# Altium PCB cuk_control_pcb_grid_connected.PcbDoc (part 1 of 2)
Units mil, origin at the board's own origin, x right, y up, seen from the top; angles counter-clockwise.
Board outline 2965 x 4860 mil, 5 copper layers (Top Layer, MIddle layer1, Signal Layer 1, MIddle Layer 2, Bottom Layer), stack 37.051 mil thick; 205 components, 129 nets, 699 pads, 80 vias.
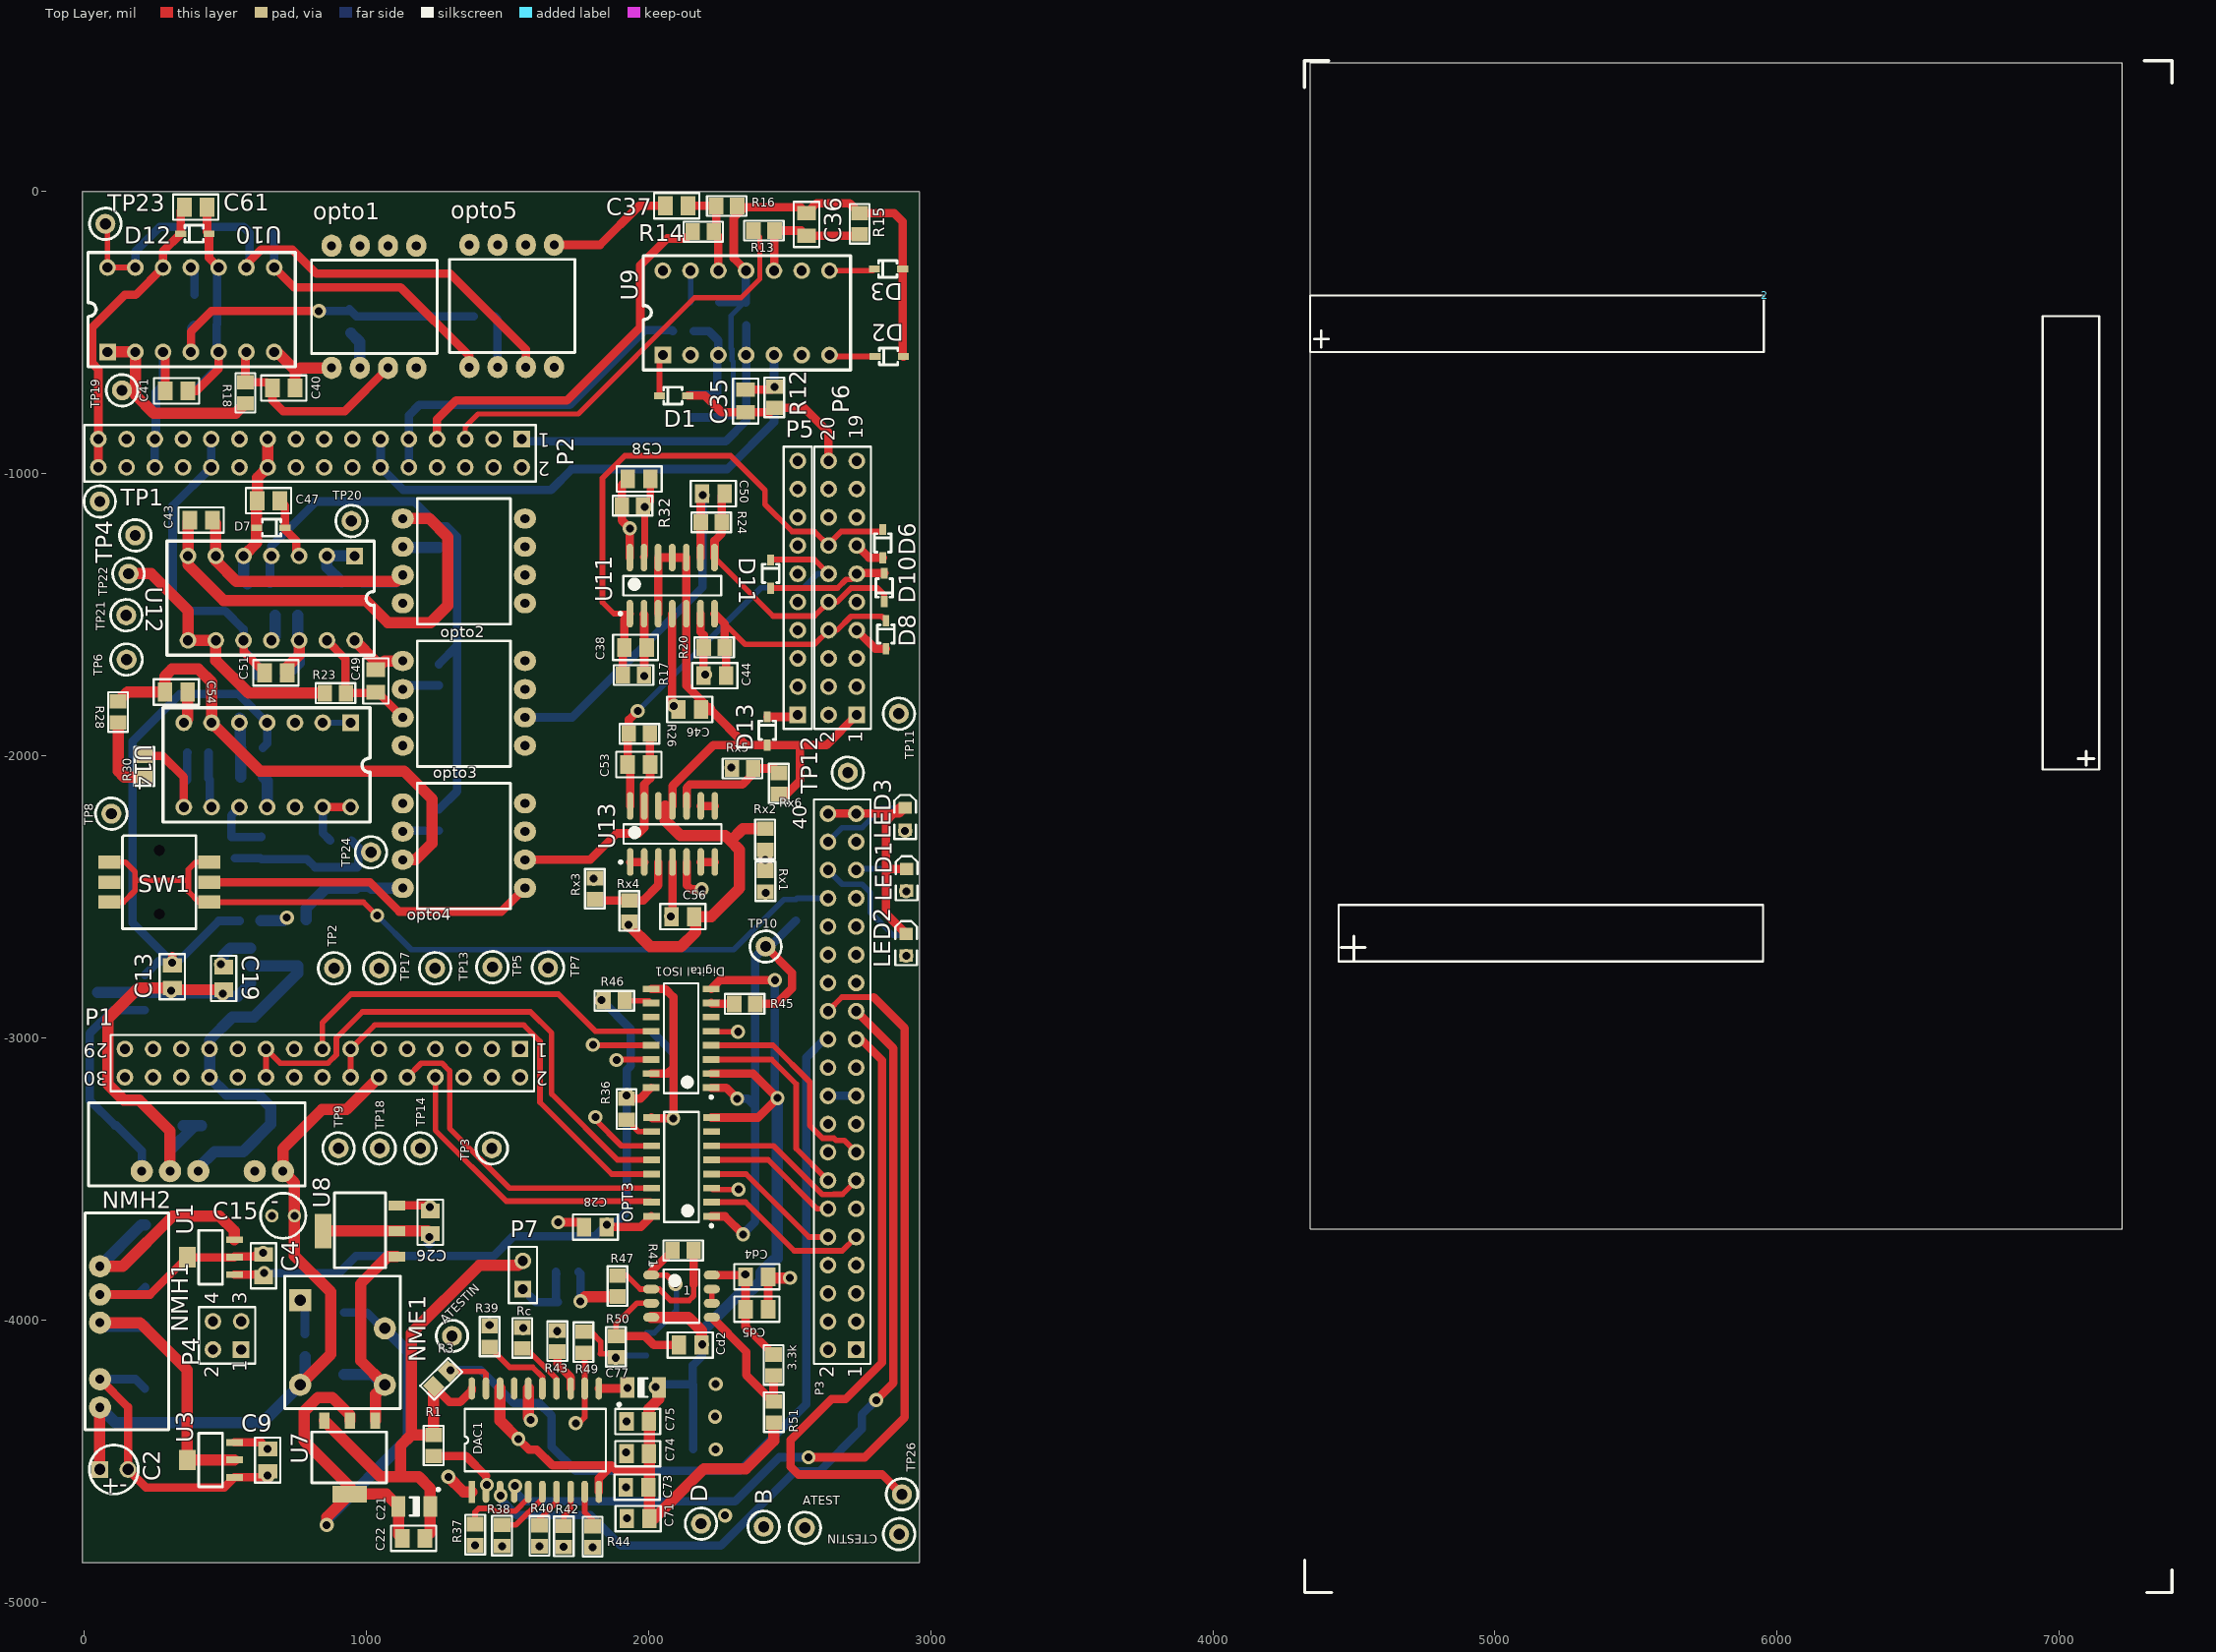
[diagram p0: Top Layer view]
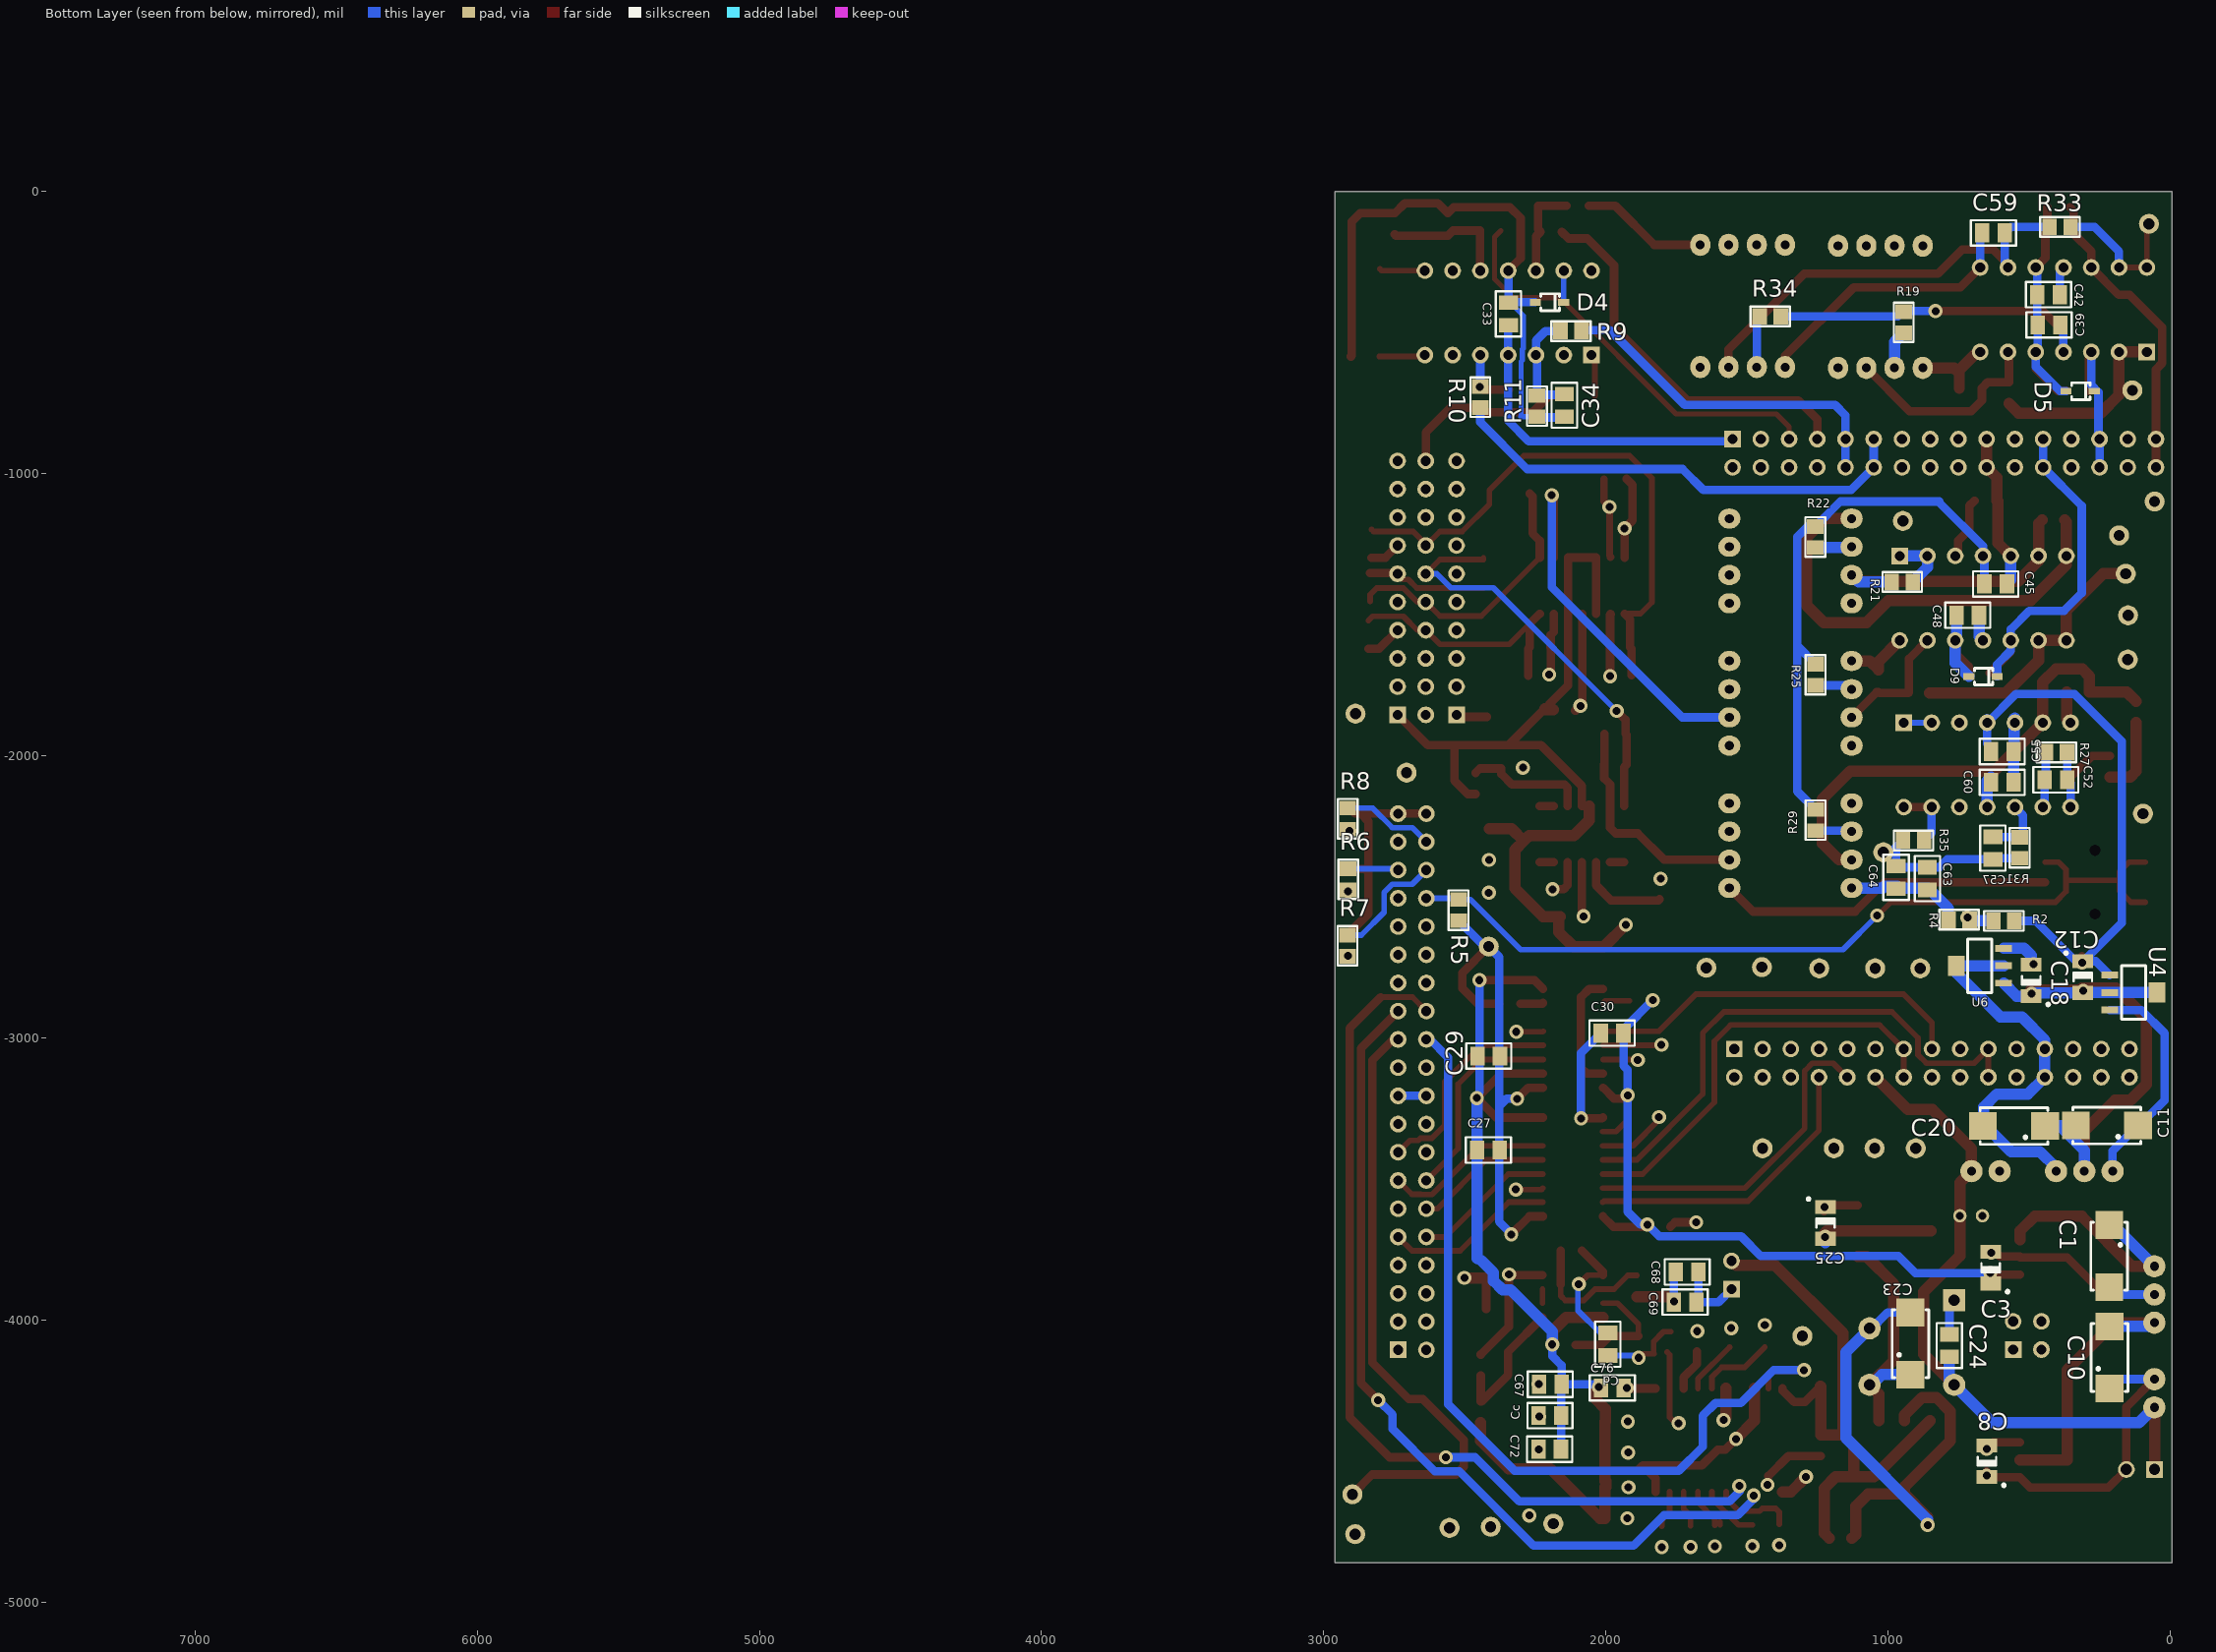
[diagram p1: Bottom Layer view, seen from below]
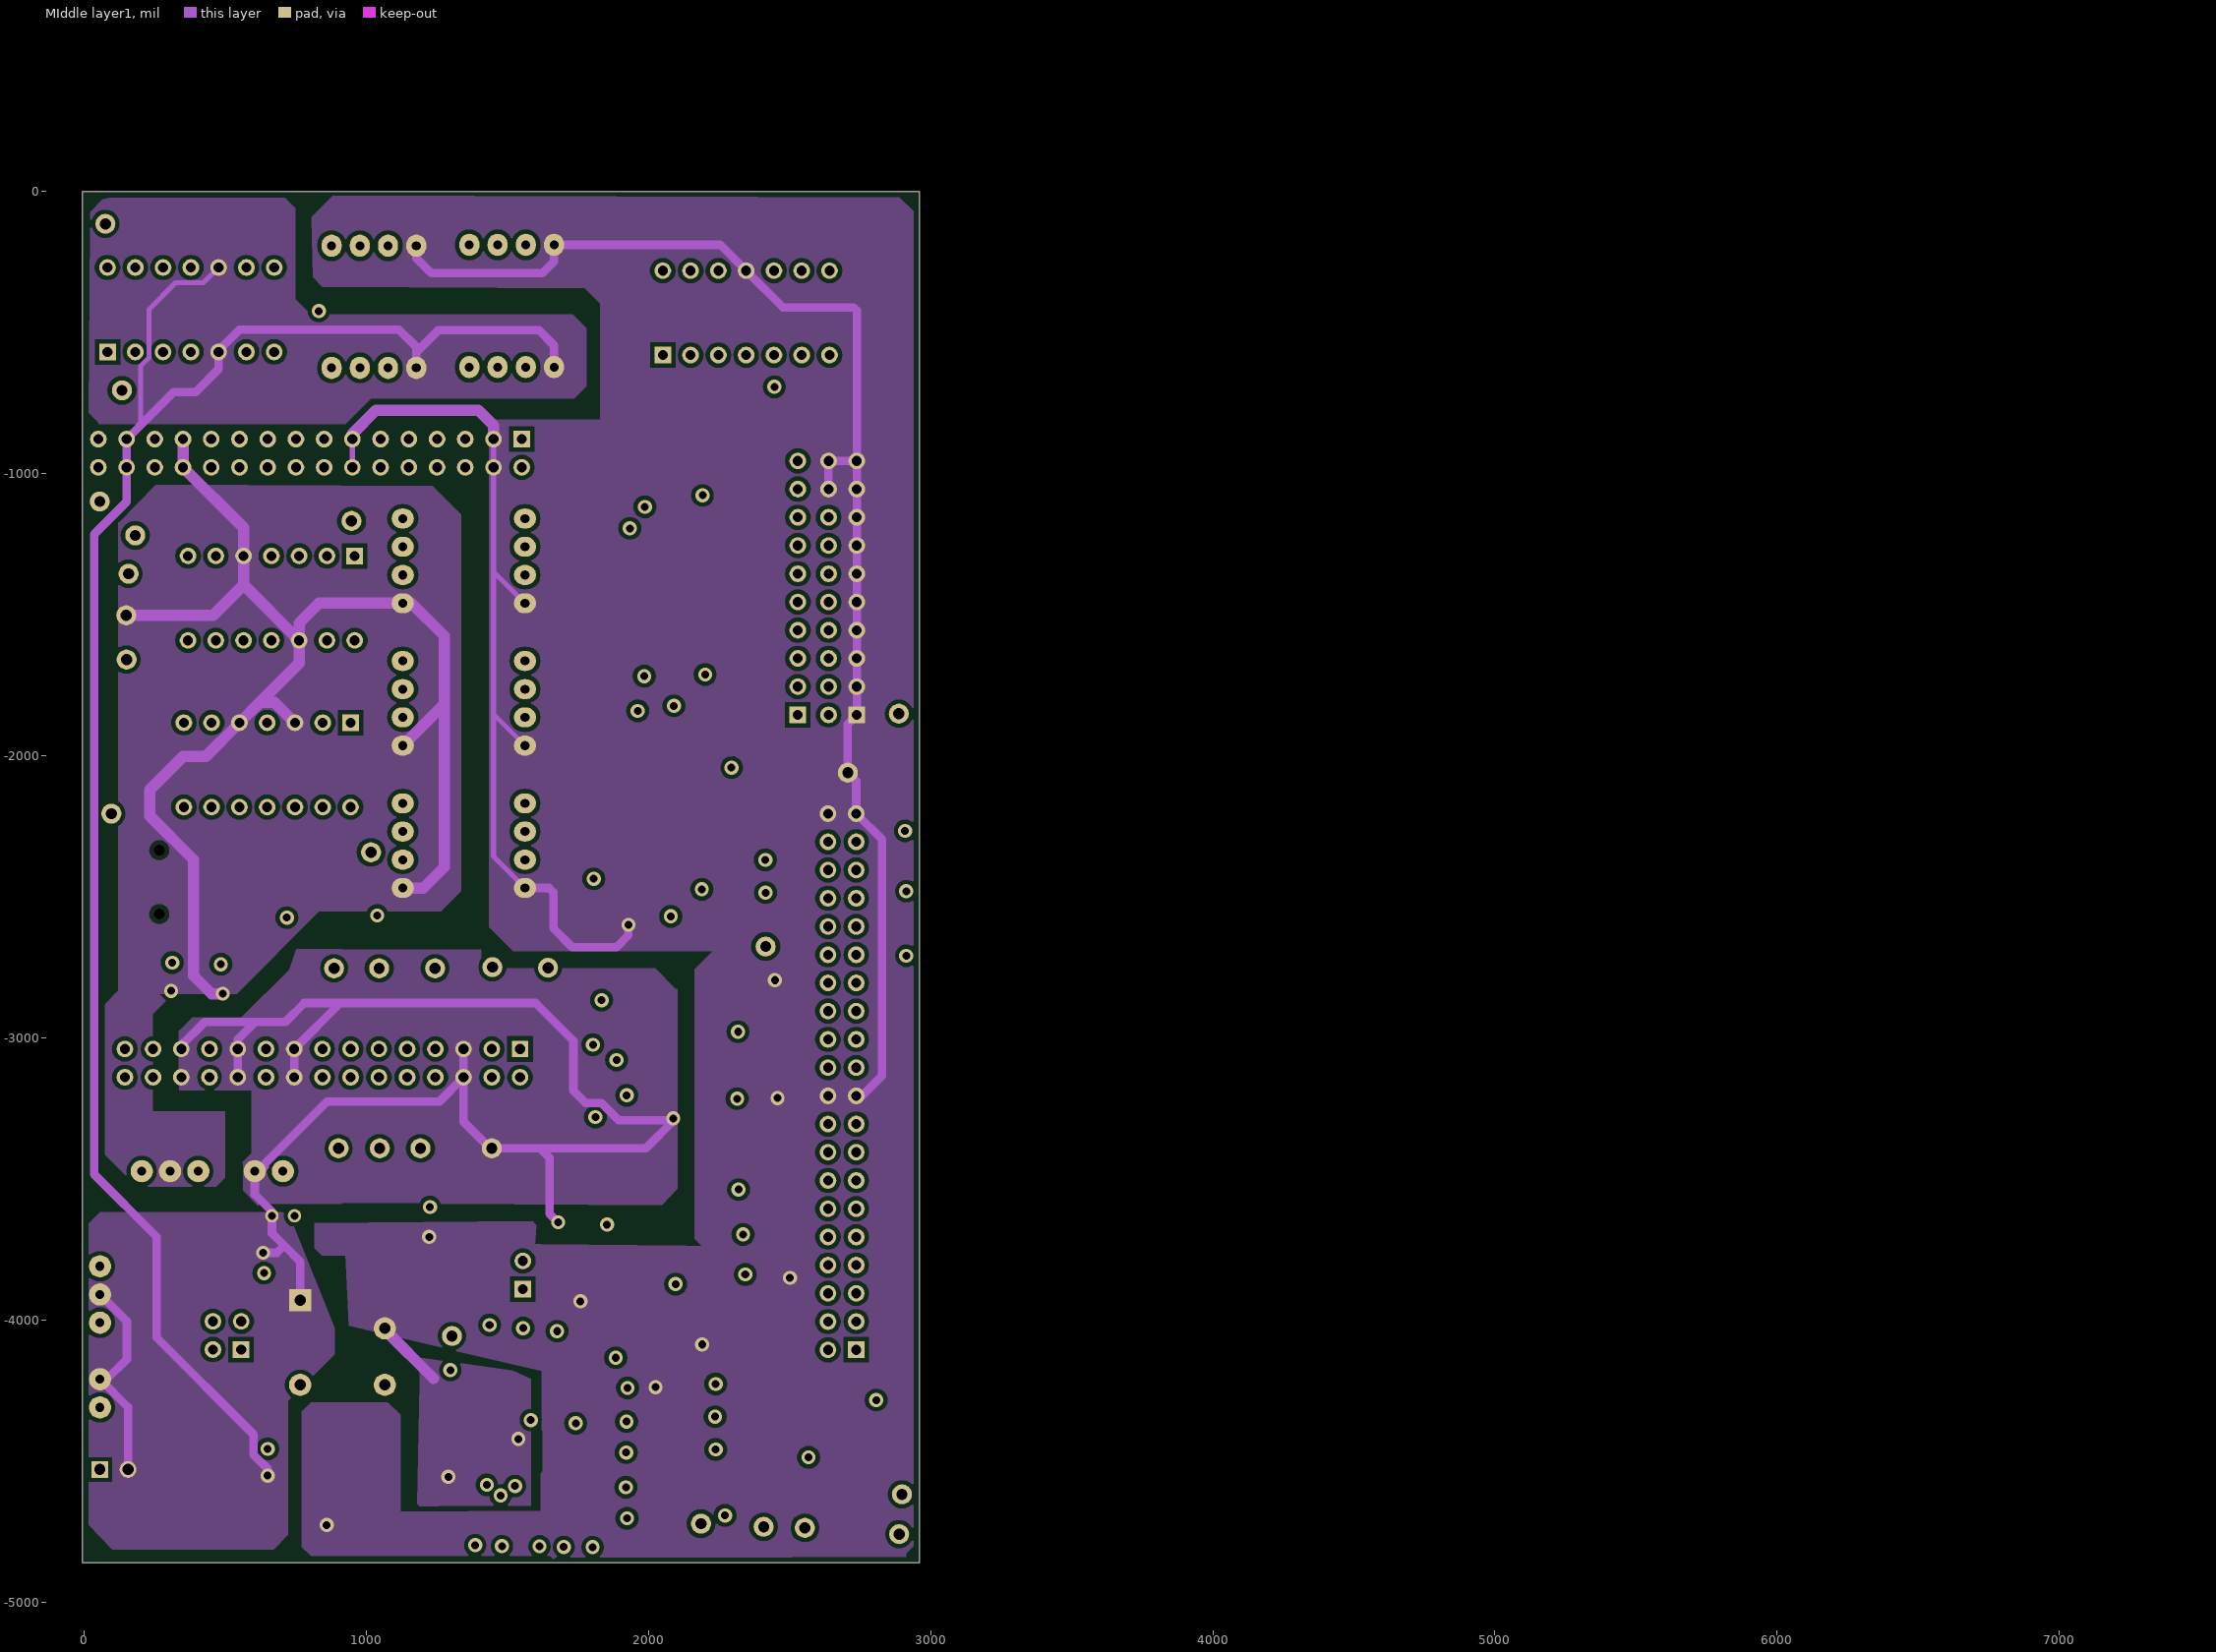
[diagram p2: MIddle layer1]
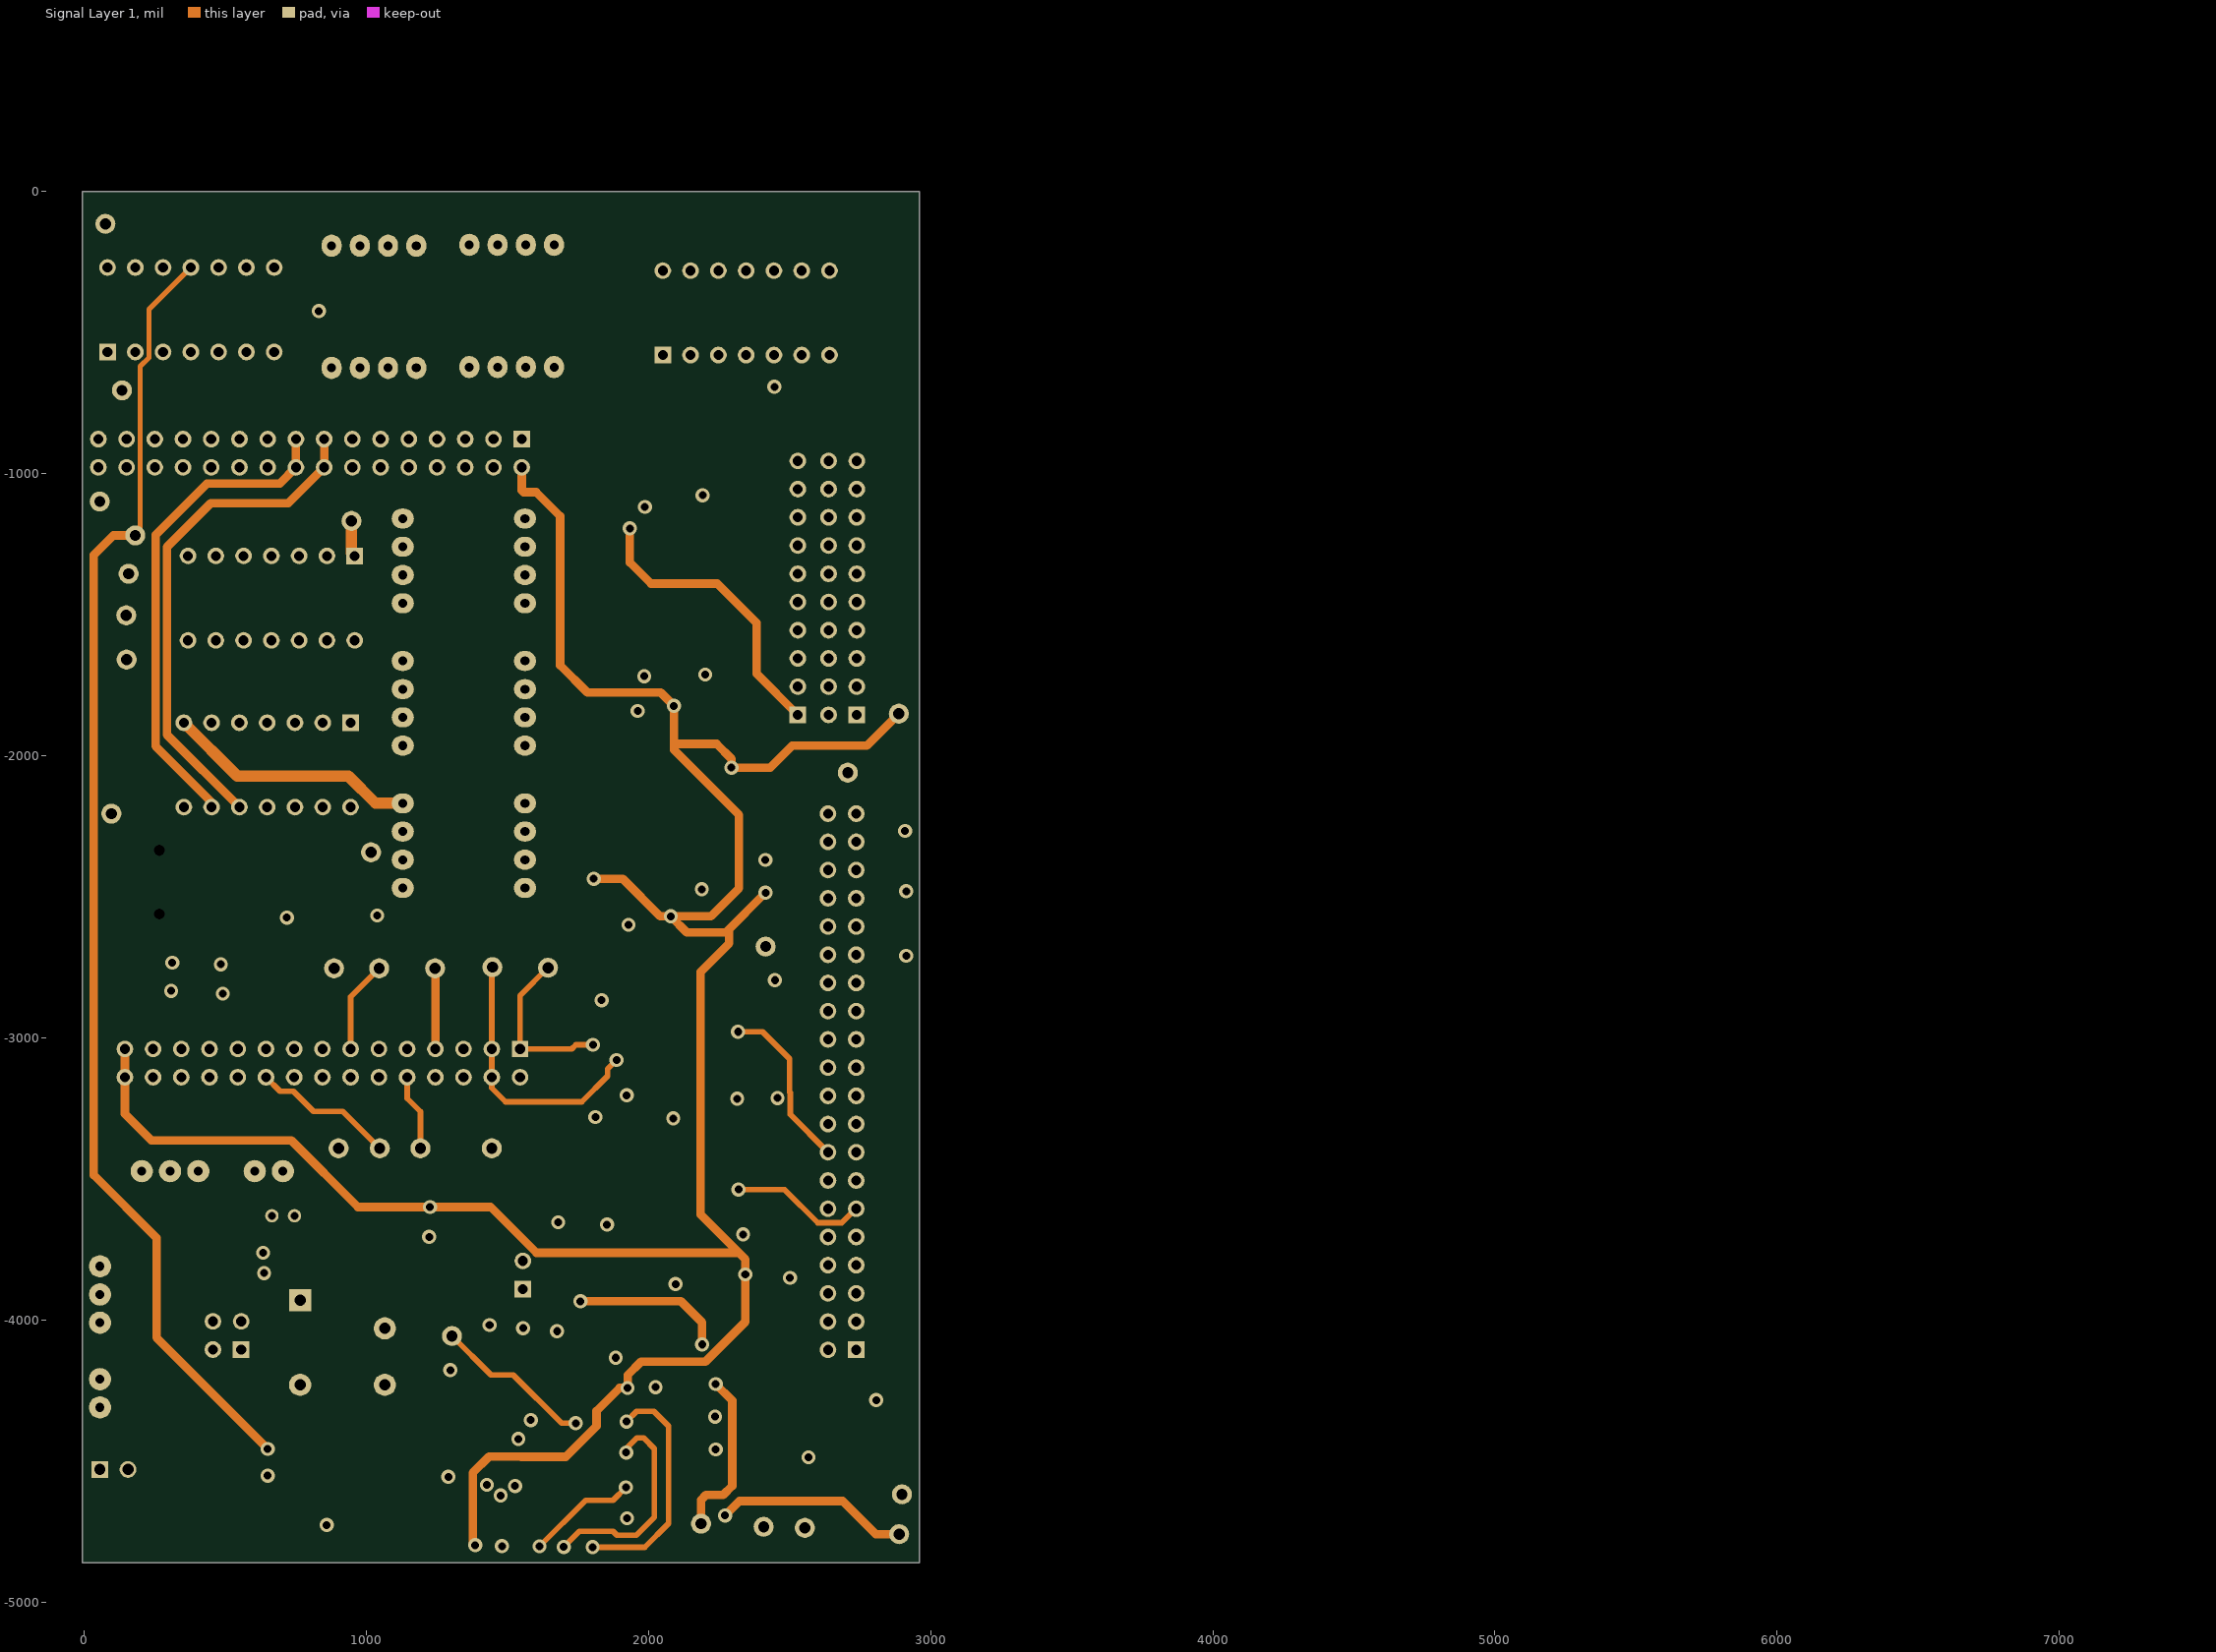
[diagram p3: Signal Layer 1]
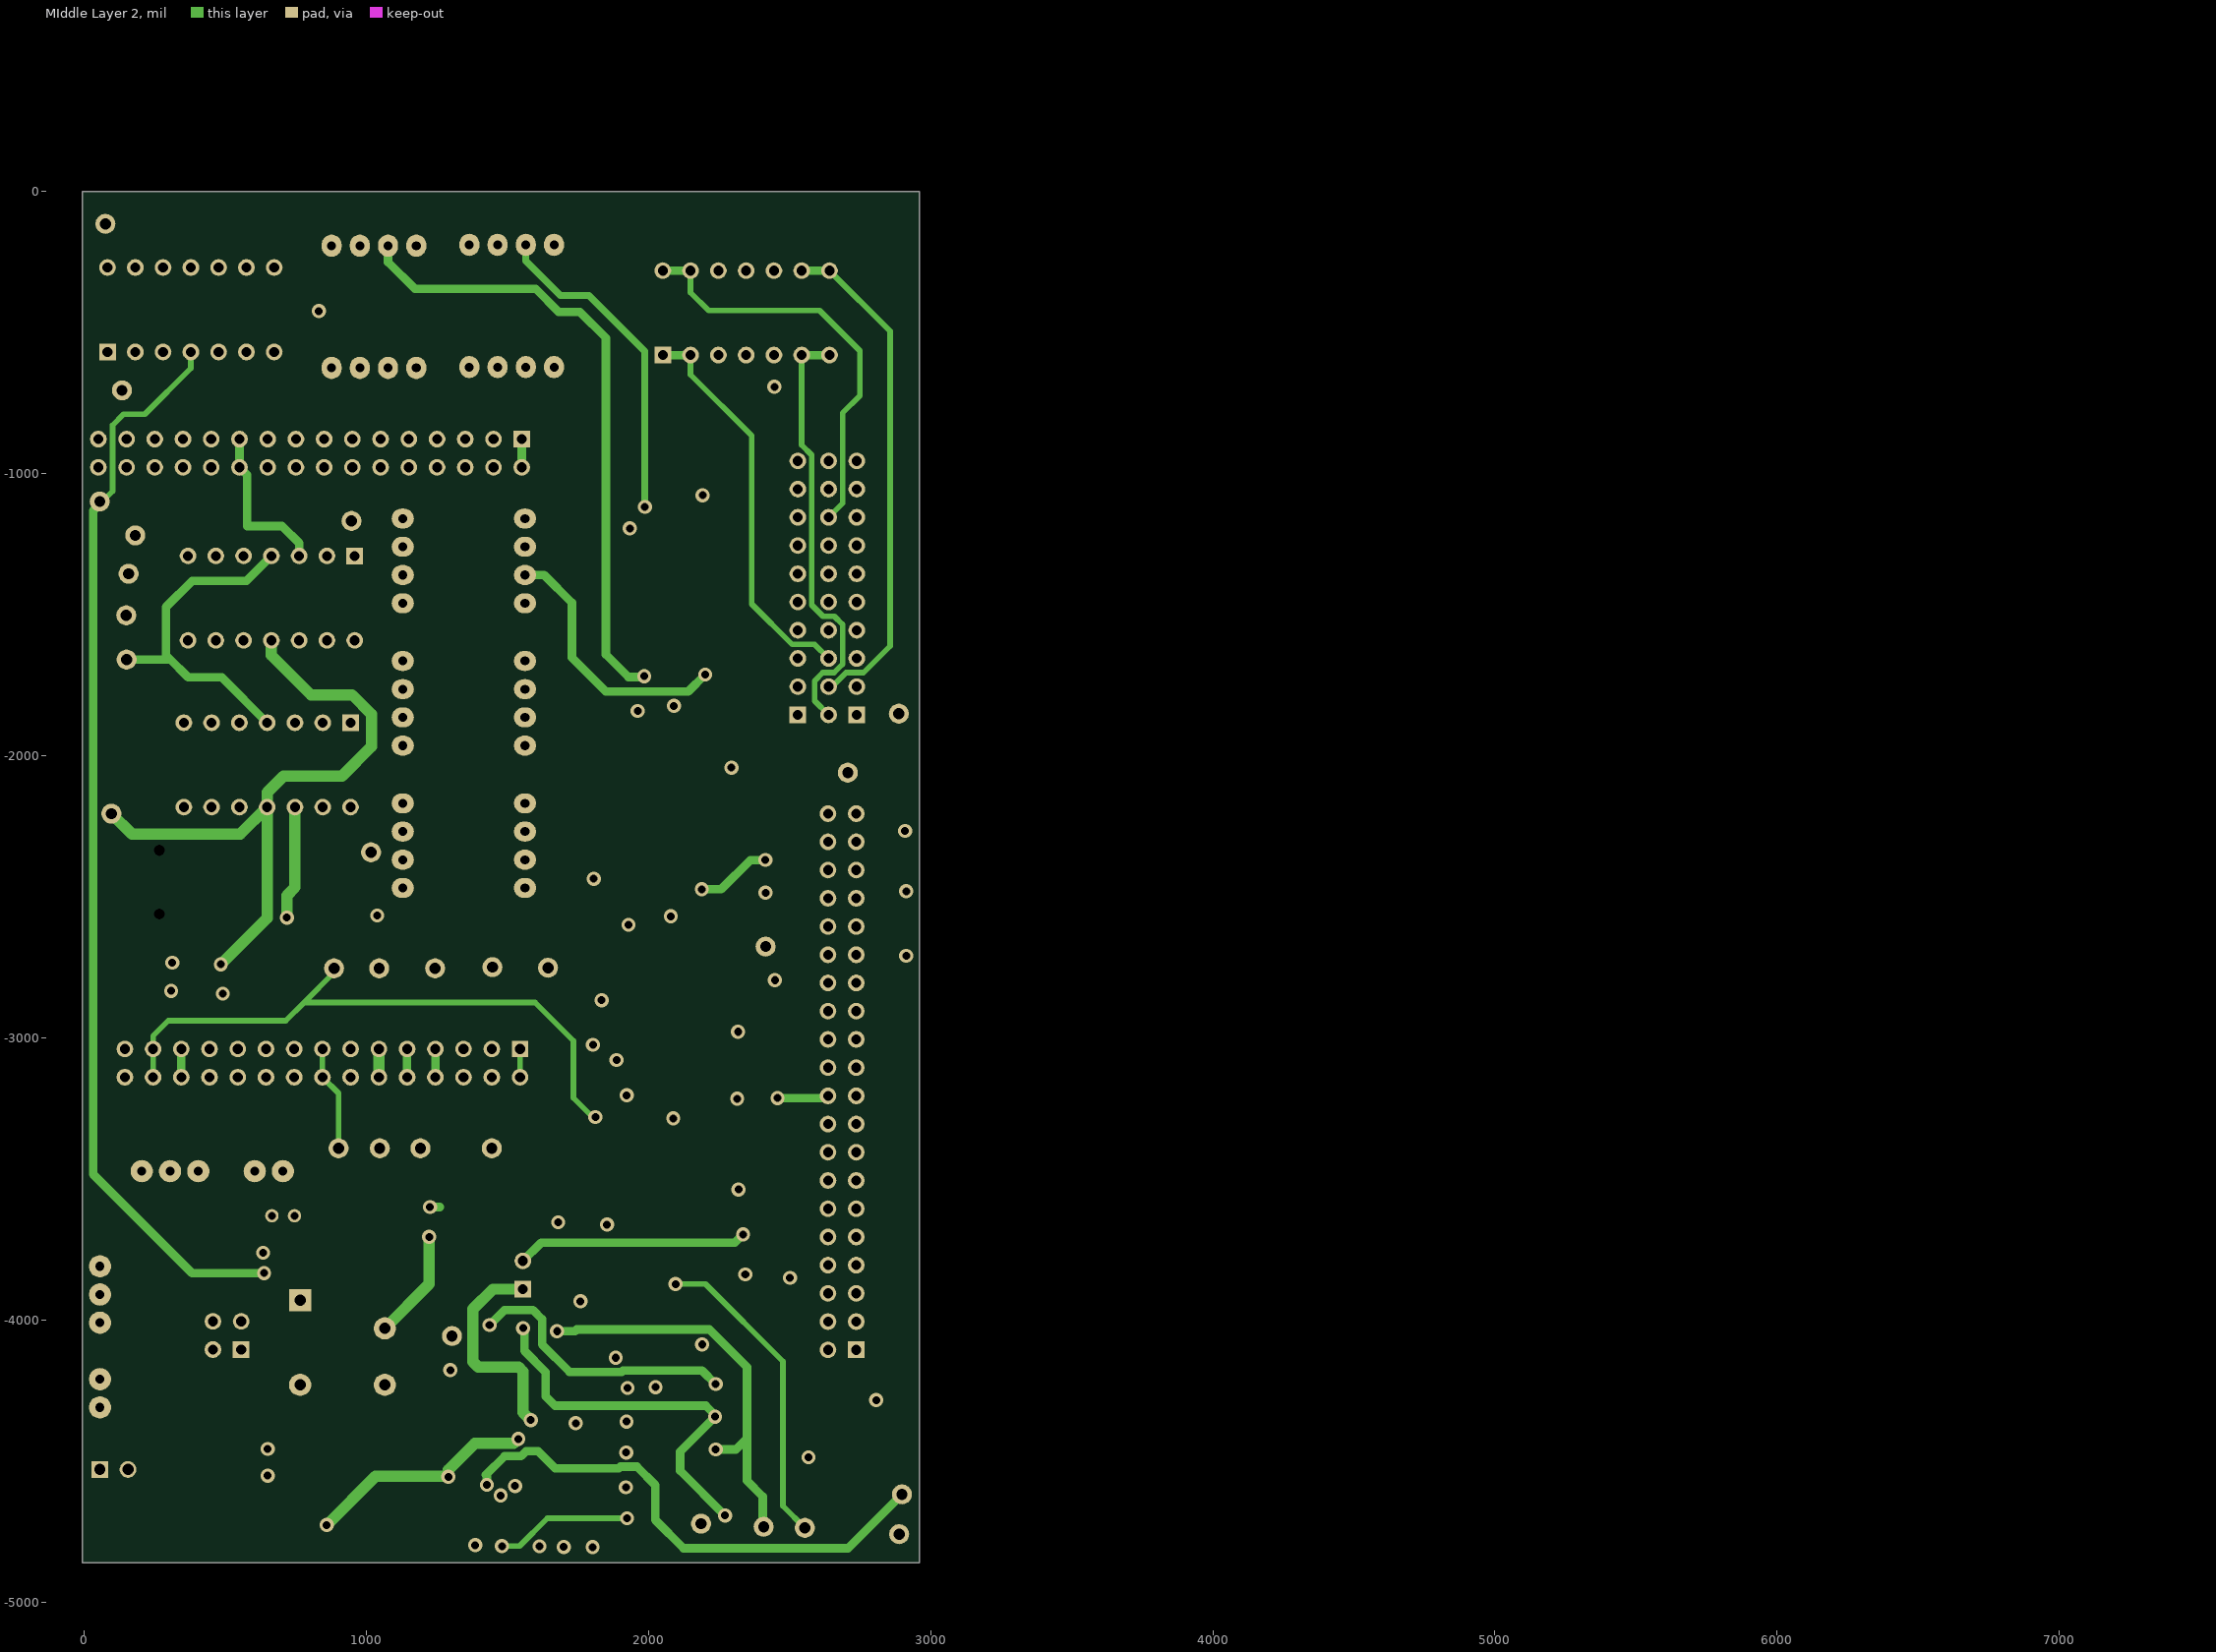
[diagram p4: MIddle Layer 2]

## Layer stack, top to bottom
Top Solder: solder mask 0.4, Solder Resist, Dk 3.5
Top Layer: signal copper 1.4
Dielectric 1: core 10, FR-4, Dk 4.2
MIddle layer1: signal copper 1.417
Dielectric 3: core 10, Dk 4.2
Signal Layer 1: signal copper 1.417
Dielectric 4: prepreg 5, Dk 4.2
MIddle Layer 2: signal copper 1.417
Dielectric 2: prepreg 5, Dk 4.2
Bottom Layer: signal copper 1.4
Bottom Solder: solder mask 0.4, Solder Resist, Dk 3.5

## Board outline
-5,-4860 2960,-4860 2960,0 -5,0

## Design rules (kind name [scope] priority, off if disabled: settings)
Clearance Clearance_1 [All] p1: gap=10 ignorepadtopadclearanceinfootprint=FALSE except(0: Arc-Hole Track-Hole SMDPad-Hole THPad-Hole Via-Hole Fill-Hole Poly-Hole Region-Hole Text-Hole; 15: THPad-Poly Via-Poly)
Clearance Clearance_2 [All] p2: gap=10 ignorepadtopadclearanceinfootprint=FALSE except(0: Arc-Hole Track-Hole SMDPad-Hole THPad-Hole Via-Hole Fill-Hole Poly-Hole Region-Hole Text-Hole)
Clearance "Clearance  3" [(OnLayer('Top Layer')) vs OnLayer('Top Layer')] p3: gap=1 ignorepadtopadclearanceinfootprint=FALSE except(0: Arc-Hole Track-Hole SMDPad-Hole THPad-Hole Via-Hole Fill-Hole Poly-Hole Region-Hole Text-Hole)
ComponentClearance [All] p1: gap=1 collisioncheckmode=3 verticalgap=10 showdistances=FALSE
MinimumSolderMaskSliver [All] p1: minsoldermaskwidth=1
PasteMaskExpansion [All] p1: expansion=4
PlaneConnect [All] p1: planeconnectstyle=Direct reliefexpansion=20 reliefentries=4 reliefconductorwidth=10 reliefairgap=10
PolygonConnect [All] p1: connectstyle=Direct reliefconductorwidth=10 reliefentries=4 polygonreliefangle="90 Angle" airgapwidth=10
RoomDefinition DAC [InComponentClass('DAC')] p1 off: confinementstyle=ConfineIn formatcopy=TRUE lockcomponents=FALSE outline 8662,-5127 12407,-5127 12407,-938 8662,-938
RoomDefinition CUK_3Ph_sig_conditioner [InComponentClass('CUK_3Ph_sig_conditioner')] p2 off: confinementstyle=ConfineIn formatcopy=TRUE lockcomponents=FALSE outline 7437,2673 9437,2673 9437,3673 7437,3673
RoomDefinition CUK_3Ph_Power_Supplys [InComponentClass('CUK_3Ph_Power_Supplys')] p3 off: confinementstyle=ConfineIn formatcopy=TRUE lockcomponents=FALSE outline 4774,2726 6774,2726 6774,3726 4774,3726
RoomDefinition CUK_3Ph_dig_iso_interface [InComponentClass('CUK_3Ph_dig_iso_interface')] p4 off: confinementstyle=ConfineIn formatcopy=TRUE lockcomponents=FALSE outline 1753,2620 3753,2620 3753,3620 1753,3620
RoomDefinition CUK_3Ph_Analog_Isolation [InComponentClass('CUK_3Ph_Analog_Isolation')] p5 off: confinementstyle=ConfineIn formatcopy=TRUE lockcomponents=FALSE outline 5216,3894 7216,3894 7216,4894 5216,4894
RoutingVias [All] p1: holewidth=28 width=50 viastyle="Through Hole" minholewidth=28 minwidth=50 maxholewidth=28 maxwidth=50
SilkToSilkClearance [All] p1: silktosilkclearance=1
SilkToSolderMaskClearance [IsPad] p1: minsilkscreentomaskgap=1 clearancetoexposedcopper=TRUE
SolderMaskExpansion [All] p1: expansion=4
Width [All] p1: maxlimit=100 minlimit=10 preferedwidth=40
24 further rules are at their usual default settings.

## Classes and differential pairs
component class DAC: 1 3.3k ATEST ATESTIN B C67 C68 C69 C71 C72 C73 C74 C75 C76 C77 Cc Cd Cd2 Cd4 Cd5 CTESTIN D DAC1 P7 R1 R3 R37 R38 R39 R40 R41 R42 R43 R44 R47 R49 R50 R51 Rc TP26
component class CUK_3Ph_sig_conditioner: C33 C34 C35 C36 C37 D1 D2 D3 D4 R9 R10 R11 R12 R13 R14 R15 R16 U9
component class CUK_3Ph_Power_Supplys: C1 C2 C3 C4 C8 C9 C10 C11 C12 C13 C15 C18 C19 C20 C21 C22 C23 C24 C25 C26 NME1 NMH1 NMH2 R2 R4 TP1 TP3 TP4 TP6 TP8 TP10 TP11 TP12 U1 U3 U4 U6 U7 U8
component class CUK_3Ph_dig_iso_interface: C27 C28 C29 C30 "Digital ISO1" LED1 LED2 LED3 OPT3 P1 P2 P3 P4 P5 P6 R5 R6 R7 R8 R36 R45 R46 SW1 TP2 TP5 TP7 TP9 TP13 TP14 TP17 TP18
component class CUK_3Ph_Analog_Isolation: C38 C39 C40 C41 C42 C43 C44 C45 C46 C47 C48 C49 C50 C51 C52 C53 C54 C55 C56 C57 C58 C59 C60 C61 C63 C64 C65 C66 D5 D6 D7 D8 D9 D10 D11 D12 D13 opto1 opto2 opto3 opto4 opto5 R17 R18 R19 R20 R21 R22 R23 R24 R25 R26 R27 R28 R29 R30 R31 R32 R33 R34 R35 Rx1 Rx2 Rx3 Rx4 Rx5 Rx6 TP19 TP20 TP21 TP22 TP23 TP24 U10 U11 U12 U13 U14

## Components (designator, comment, footprint, x,y, rotation, side; value= is the part's Value field where it differs from the comment)
1 "TLC2272 SOIC-8" AD8056 2118,-3915 r0 top
2 "Control Board" "Control Board" 5955,-368 r180 top (schematic designator 1)
3.3k "Res1" "0805 RES" 2444.07,-4159 r90 top
ATEST "Test point" "Test Point" 2555,-4736 r90 top
ATESTIN "Test point" "Test Point" 1305,-4056 r90 top
B "Test point" "Test Point" 2409,-4732 r90 top
C1 "Tantalium" "Cap tantal 22u-25V" 218,-3773 r270 bottom value=22uF
C2 "electrolytic" CAP-10u-16V 57,-4529 r0 top value=10uF
C3 "Tantalium/T520A226M006ATE090" "Cap Tantal 3216" 638,-3819 r90 bottom value=22uF
C4 "Cap" "Capacitor 0805" 637,-3807 r270 top value=470nF
C8 "Tantalium/T520A226M006ATE090" "Cap Tantal 3216" 651,-4505 r90 bottom value=22uF
C9 "Cap" "Capacitor 0805" 652,-4496 r270 top value=470nF
C10 "Tantalium" "Cap tantal 22u-25V" 217,-4132 r90 bottom value=22uF
C11 "Tantalium" "Cap tantal 22u-25V" 226,-3310 r0 bottom value=22uF
C12 "Tantalium/T520A226M006ATE090" "Cap Tantal 3216" 311,-2779 r270 bottom value=22uF
C13 "Cap" "Capacitor 0805" 314,-2783 r90 top value=470nF
C15 "electrolytic" "Cap elec 10u/16V" 707,-3630 r180 top value=10uF
C18 "Tantalium/T520A226M006ATE090" "Cap Tantal 3216" 494,-2801 r90 bottom value=22uF
C19 "Cap" "Capacitor 0805" 496,-2789 r270 top value=470nF
C20 "Tantalium" "Cap tantal 22u-25V" 555,-3312 r0 bottom value=22uF
C21 "Tantalium/T520A226M006ATE090" "Cap Tantal 3216" 1176.53,-4660 r180 top value=22uF
C22 "Cap" "Capacitor 0805" 1169,-4773 r0 top value=470nF
C23 "Tantalium" "Cap tantal 22u-25V" 922,-4083 r90 bottom value=22uF
C24 "Cap" "Capacitor 0805" 784,-4090 r270 bottom value=470nF
C25 "Tantalium/T520A226M006ATE090" "Cap Tantal 3216" 1223,-3650.48 r270 bottom value=22uF
C26 "Cap" "Capacitor 0805" 1228,-3653 r90 top value=470nF
C27 "Cap" "Capacitor 0805" 2417,-3397 r0 bottom value=470nF
C28 "Cap" "Capacitor 0805" 1813,-3670 r180 top value=470nF
C29 "Cap" "Capacitor 0805" 2416,-3064 r0 bottom value=470nF
C30 "Cap" "Capacitor 0805" 1979,-2983 r0 bottom value=470nF
C33 "Cap" "Capacitor 0805" 2346,-434 r270 bottom value=470nF
C34 "Cap" "Capacitor 0805" 2148,-758 r90 bottom value=1nF
C35 "Cap" "Capacitor 0805" 2345,-743 r90 top value=1nF
C36 "Cap" "Capacitor 0805" 2561,-117 r270 top value=1nF
C37 "Cap" "Capacitor 0805" 2101,-51 r0 top value=1nF
C38 "Cap" "Capacitor 0805" 1955,-1616 r180 top value=1nF
C39 "Cap" "Capacitor 0805" 431,-473 r180 bottom value=470nF
C40 "Cap" "Capacitor 0805" 709,-697 r0 top value=0.1nF
C41 "Cap" "Capacitor 0805" 329,-707 r0 top value=10nF
C42 "Cap" "Capacitor 0805" 433,-366 r180 bottom value=470nF
C43 "Cap" "Capacitor 0805" 416,-1165 r180 top value=0.1nF
C44 "Cap" "Capacitor 0805" 2236,-1716 r0 top value=1nF
C45 "Cap" "Capacitor 0805" 620,-1391 r0 bottom value=470nF
C46 "Cap" "Capacitor 0805" 2147,-1836 r180 top value=470nF
C47 "Cap" "Capacitor 0805" 655,-1096 r180 top value=10nF
C48 "Cap" "Capacitor 0805" 719,-1502 r180 bottom value=470nF
C49 "Cap" "Capacitor 0805" 1035,-1735 r90 top value=0.1nF
C50 "Cap" "Capacitor 0805" 2231,-1071 r0 top value=1nF
C51 "Cap" "Capacitor 0805" 681,-1706 r0 top value=10nF
C52 "Cap" "Capacitor 0805" 407,-2085 r180 bottom value=1nF
C53 "Cap" "Capacitor 0805" 1967,-2031 r180 top value=1nF
C54 "Cap" "Capacitor 0805" 328,-1774 r0 top value=0.1nF
C55 "Cap" "Capacitor 0805" 597,-1985 r0 bottom value=470nF
C56 "Cap" "Capacitor 0805" 2123,-2570 r180 top value=470nF
C57 "Cap" "Capacitor 0805" 630,-2327 r270 bottom value=1nF
C58 "Cap" "Capacitor 0805" 1968,-1019 r180 top value=1nF
C59 "Cap" "Capacitor 0805" 628,-147 r0 bottom value=0.1nF
C60 "Cap" "Capacitor 0805" 597,-2094 r0 bottom value=470nF
C61 "Cap" "Capacitor 0805" 397,-56 r0 top value=10nF
C63 "Cap" "Capacitor 0805" 862,-2435 r270 bottom value=470nF
C64 "Cap" "Capacitor 0805" 973,-2431 r270 bottom value=1nF
C67 "Cap" "Capacitor 0805" 2198,-4227 r180 bottom value=100pF
C68 "Cap" "Capacitor 0805" 1713,-3829 r0 bottom value=100pF
C69 "Cap" "Capacitor 0805" 1720,-3936 r0 bottom value=100pF
C71 "Cap" "Capacitor 0805" 1964,-4703 r0 top value=100pF
C72 "Cap" "Capacitor 0805" 2200,-4457 r180 bottom value=100pF
C73 "Cap" "Capacitor 0805" 1961,-4592 r0 top value=100pF
C74 "Cap" "Capacitor 0805" 1963,-4473 r0 top value=100pF
C75 "Cap" "Capacitor 0805" 1963,-4359 r0 top value=100pF
C76 "Cap" "Capacitor 0805" 1978,-4240 r180 bottom value=0.1uF
C77 "Tantalium/T520A226M006ATE090" "Cap Tantal 3216" 1977,-4239.05 r0 top value=10uF
Cc "Cap" "Capacitor 0805" 2199,-4338 r180 bottom value=100pF
Cd "Cap" "Capacitor 0805" 1994,-4085 r270 bottom value=100pF
Cd2 "Cap" "Capacitor 0805" 2149,-4088 r0 top value=100pF
Cd4 "Cap" "Capacitor 0805" 2385,-3846 r0 top value=0.01u
Cd5 "Cap" "Capacitor 0805" 2385,-3961 r0 top value=10u
CTESTIN "Test point" "Test Point" 2889,-4758 r90 top
D "Test point" "Test Point" 2187,-4721 r180 top
D1 "Z4.7-DZ2J047" "Zener DZ2J047" 2090,-724 r180 top
D2 "Z4.7-DZ2J047" "Zener DZ2J047" 2854,-585 r180 top
D3 "Z4.7-DZ2J047" "Zener DZ2J047" 2851,-275 r180 top
D4 "Z4.7-DZ2J047" "Zener DZ2J047" 2201,-393 r180 bottom
D5 "Z4.7-DZ2J047" "Zener DZ2J047" 321,-708 r180 bottom
D6 "Z4.7-DZ2J047" "Zener DZ2J047" 2831,-1248 r90 top
D7 "Z4.7-DZ2J047" "Zener DZ2J047" 663,-1192 r0 top
D8 "Z4.7-DZ2J047" "Zener DZ2J047" 2842,-1571 r90 top
D9 "Z4.7-DZ2J047" "Zener DZ2J047" 665,-1719 r180 bottom
D10 "Z4.7-DZ2J047" "Zener DZ2J047" 2836,-1403 r270 top
D11 "Z4.7-DZ2J047" "Zener DZ2J047" 2434,-1356 r90 top
D12 "Z4.7-DZ2J047" "Zener DZ2J047" 394,-150 r180 top
D13 "Z4.7-DZ2J047" "Zener DZ2J047" 2422,-1912 r90 top
DAC1 "TLV5630" TLV5630 1375.13,-4608 r90 top
"Digital ISO1" "Si8631BC-B-IS1" "SOIC16 Narrow width" 2117,-3001 r180 top
LED1 "ON" "LED 0805" 2915.4,-2440 r90 top
LED2 "ON" "LED 0805" 2914,-2670 r90 top
LED3 "ON" "LED 0805" 2910.4,-2223 r90 top
NME1 "NME1209DC" NME1209DC 767,-3929 r270 top
NMH1 "NMH1209SC" NMH1209SC 58,-4309 r90 top
NMH2 "NMH1209SC" NMH1209SC 706,-3472 r180 top
OPT3 "SI8650EC-B-IS1" SOIC16pin 2118,-3457 r180 top
opto1 "HCNR200." HCNR200 1030,-409 r0 top
opto2 "HCNR200." HCNR200 1347,-1311 r270 top
opto3 "HCNR200." HCNR200 1347,-1815.5 r270 top
opto4 "HCNR200." HCNR200 1347,-2320 r270 top
opto5 "HCNR200." HCNR200 1518,-406 r0 top
P1 "Header 15X2" HDR2X15 1546,-3039 r180 top
P2 "Header 16X2" HDR2X16 1552,-878 r180 top
P3 "DSK P8 Digital Interface" HDR2X20 2737,-4105 r90 top
P4 "Header 2X2" HDR2X2 558,-4104 r90 top
P5 "DSK P5 Analog Interface" HDR1X10 2530,-1855 r90 top
P6 "DSK P9 Analog Interface" HDR2X10 2739,-1855 r90 top
P7 "Jumper 1" HDR1X2 1556,-3890 r90 top
R1 "Res1" "0805 RES" 1240,-4444 r90 top value=5k
R2 "Res1" "0805 RES" 591,-2585 r180 bottom value=10k
R3 "Res1" "0805 RES" 1267,-4208 r225 top value=5k
R4 "Res1" "0805 RES" 750,-2581 r180 bottom value=5k
R5 "Res1" "0805 RES" 2523,-2547 r90 bottom value=10k
R6 "Res1" "0805 RES" 2914,-2438 r270 bottom value=220
R7 "Res1" "0805 RES" 2916.4,-2673 r270 bottom value=220
R8 "Res1" "0805 RES" 2915.4,-2223 r270 bottom value=220
R9 "Res1" "0805 RES" 2124.6,-495 r180 bottom value=1k-0.1%
R10 "Res1" "0805 RES" 2446,-729 r270 bottom value=1k-0.1%
R11 "Res1" "0805 RES" 2245,-761 r90 bottom value=1.5k-0.1%
R12 "Res1" "0805 RES" 2447,-730 r90 top value=1.5k-0.1%
R13 "Res1" "0805 RES" 2410,-139 r180 top value=1k-0.1%
R14 "Res1" "0805 RES" 2195,-143 r180 top value=1k-0.1%
R15 "Res1" "0805 RES" 2749,-115 r270 top value=1.5k-0.1%
R16 "Res1" "0805 RES" 2278,-52 r180 top value=1.5k-0.1%
R17 "Res1" "0805 RES" 1948,-1714 r180 top value=120k-0.1%
R18 "Res1" "0805 RES" 573,-714 r90 top value=120k-0.1%
R19 "Res1" "0805 RES" 946,-464 r270 bottom value=1k
R20 "Res1" "0805 RES" 2234,-1616 r0 top value=120k-0.1%
R21 "Res1" "0805 RES" 951,-1384 r0 bottom value=120k-0.1%
R22 "Res1" "0805 RES" 1259,-1225 r270 bottom value=1k
R23 "Res1" "0805 RES" 892,-1778 r0 top value=120k-0.1%
R24 "Res1" "0805 RES" 2223.6,-1173 r0 top value=120k-0.1%
R25 "Res1" "0805 RES" 1258,-1713 r270 bottom value=1k
R26 "Res1" "0805 RES" 1969,-1922 r180 top value=120k-0.1%
R27 "Res1" "0805 RES" 405,-1988 r0 bottom value=10K
R28 "Res1" "0805 RES" 122,-1845 r90 top value=120k-0.1%
R29 "Res1" "0805 RES" 1258,-2228 r270 bottom value=1k
R30 "Res1" "0805 RES" 215,-2038 r90 top value=100
R31 "Res1" "0805 RES" 535,-2326 r90 bottom value=10K
R32 "Res1" "0805 RES" 1944.4,-1114 r180 top value=120k-0.1%
R33 "Res1" "0805 RES" 392,-126 r0 bottom value=120k-0.1%
R34 "Res1" "0805 RES" 1419,-443 r0 bottom value=1k
R35 "Res1" "0805 RES" 911,-2300 r180 bottom value=100
R36 "Res1" "0805 RES" 1923,-3252 r270 top value=10k
R37 "Res1" "0805 RES" 1387,-4760 r90 top value=10k
R38 "Res1" "0805 RES" 1482,-4763 r90 top value=2k
R39 "Res1" "0805 RES" 1438,-4058 r90 top value=2K
R40 "Res1" "0805 RES" 1615,-4764 r90 top value=2k
R41 "Res1" "0805 RES" 2124,-3752.81 r180 top value=220
R42 "Res1" "0805 RES" 1701,-4766 r270 top value=2K
R43 "Res1" "0805 RES" 1678,-4074 r90 top value=2K
R44 "Res1" "0805 RES" 1803,-4767 r270 top value=2K
R45 "Res1" "0805 RES" 2342,-2879 r180 top value=10k
R46 "Res1" "0805 RES" 1880,-2868 r180 top value=10k
R47 "Res1" "0805 RES" 1891,-3879 r90 top value=220
R49 "Res1" "0805 RES" 1771,-4078 r90 top value=220
R50 "Res1" "0805 RES" 1886,-4094 r90 top value=220
R51 "Res1" "0805 RES" 2445,-4326 r90 top value=3.3k
Rc "Res1" "0805 RES" 1554,-4063 r90 top value=2K
Rx1 "Res1" "0805 RES" 2415,-2444.88 r270 top
Rx2 "Res1" "0805 RES" 2414,-2296 r270 top value=3.3k
Rx3 "Res1" "0805 RES" 1811,-2471 r90 top
Rx4 "Res1" "0805 RES" 1933,-2550 r90 top value=3.3k
Rx5 "Res1" "0805 RES" 2334,-2045 r180 top
Rx6 "Res1" "0805 RES" 2463.07,-2098 r90 top value=3.3k
SW1 "PB- K5A2 4N AU" "push button" 268,-2447.81 r90 top
TP1 "Test point" "Test Point" 57,-1099 r0 top
TP2 "Test point" "Test Point" 887,-2753 r0 top
TP3 "Test point" "Test Point" 1446,-3391 r180 top
TP4 "Test point" "Test Point" 183,-1219 r0 top
TP5 "Test point" "Test Point" 1448,-2749 r0 top
TP6 "Test point" "Test Point" 152,-1659 r90 top
TP7 "Test point" "Test Point" 1645,-2751 r90 top
TP8 "Test point" "Test Point" 98,-2205 r0 top
TP9 "Test point" "Test Point" 903,-3391 r270 top
TP10 "Test point" "Test Point" 2416,-2676 r180 top
TP11 "Test point" "Test Point" 2888,-1851 r180 top
TP12 "Test point" "Test Point" 2707,-2060 r180 top
TP13 "Test point" "Test Point" 1245,-2753 r0 top
TP14 "Test point" "Test Point" 1193,-3391 r180 top
TP17 "Test point" "Test Point" 1047,-2753 r270 top
TP18 "Test point" "Test Point" 1049,-3391 r270 top
TP19 "Test point" "Test Point" 136,-705 r180 top
TP20 "Test point" "Test Point" 949,-1168 r0 top
TP21 "Test point" "Test Point" 151,-1502 r180 top
TP22 "Test point" "Test Point" 159,-1355 r90 top
TP23 "Test point" "Test Point" 77,-115 r90 top
TP24 "Test point" "Test Point" 1018,-2342 r90 top
TP26 "Test point" "Test Point" 2899,-4617 r90 top
U1 "L78L05ABUTR" "Reg SOT-89 +5"#1 367,-3777 r0 top
U3 "L79L05ABUTR" "Reg SOT-89"#1 367,-4495 r0 top
U4 "L78L05ABUTR" "Reg SOT-89 +5"#2 49,-2839 r0 bottom
U6 "L79L05ABUTR" "Reg SOT-89"#2 759,-2744 r180 bottom
U7 "µA78M33CDCYR" "Reg - SOT223" 943,-4616 r90 top
U8 "µA78M05CDCYR" "Reg - SOT223" 849,-3684 r0 top
U9 "TS27L4IN" DIP14 2051.72,-580 r90 top
U10 "TL074CNSR" DIP14 84.57,-569 r90 top
U11 "TLC2274ACD" SOIC14 2085,-1397 r90 top
U12 "TL074CN" DIP14 960.28,-1291.79 r270 top
U13 "TLC2274ACD" SOIC14 2086,-2277 r90 top
U14 "TL074CN" DIP14 945.43,-1882.79 r270 top

## Footprints (in the part's own frame and the unit in brackets; to place one, negate y for a bottom-side part, rotate by r counter-clockwise, add the part's x,y. Pads: shape width x height; smd on the part's side, far side on the other; paste and mask are expansions set on the pad)
"0805 RES" [mm]
  rect 1.3x1.5 smd: 1(-0.95,0) 2(0.95,0)
  silkscreen extent -1.78,-0.89 1.78,0.89
AD8056 [mm]
  oval 1.45x0.8 smd: 1(-2.725,1.905) 2(-2.725,0.635) 3(-2.725,-0.635) 4(-2.725,-1.905) 5(2.725,-1.905) 6(2.725,-0.635) 7(2.725,0.635) 8(2.725,1.905)
  silkscreen extent -2.85,-2.4 1.6,2.98, body extent -2,-2.4 2,2.4, height 1.75
"Cap elec 10u/16V" [mm]
  round 1.2 hole 0.7: 1(-1.016,0) 2(1.016,0)
  silkscreen extent -2.03,-2.03 2.03,2.03
"Cap tantal 22u-25V" [mm]
  rect 2.5x2.5 smd: 1(-2.794,0) 2(2.794,0)
  silkscreen extent -3.05,-1.65 3.05,1.65
"Cap Tantal 3216" [mm]
  rect 1.25x1.85 smd: 1(-1.298,0) 2(1.552,0)
  silkscreen extent -2.16,-1.65 0.53,0.82, body extent -1.52,-0.9 1.78,0.9, height 1.6
CAP-10u-16V [mm]
  rect 1.5x1.5 hole 1: 1(0,0)
  round 1.5 hole 1: 2(2.54,0)
  silkscreen extent -0.93,-2.2 3.47,2.2
"Capacitor 0805" [mm]
  rect 1.3x1.7 smd: 1(-1.016,0) 2(1.016,0)
  silkscreen extent -2.03,-1.14 2.03,1.14
"Control Board" [mil]
  silkscreen extent -1444,-831 1630,4597, body extent -1444,-1037 1630,4597, height 2000
DIP14 [mm]
  rect 1.5x1.5 hole 0.9: 1(0,0)
  round 1.5 hole 0.9: 2(0,-2.5) 3(0,-5) 4(0,-7.5) 5(0,-10) 6(0,-12.5) 7(0,-15) 8(7.6,-15) 9(7.6,-12.5) 10(7.6,-10) 11(7.6,-7.5) 12(7.6,-5) 13(7.6,-2.5) 14(7.6,0)
  silkscreen extent -1.34,-16.89 8.94,1.76
HCNR200 [mm]
  oval 1.8x2 hole 0.8: 1(-3.85,-5.5) 2(-1.31,-5.5) 3(1.23,-5.5) 4(3.77,-5.5) 5(3.77,5.5) 6(1.23,5.5) 7(-1.31,5.5) 8(-3.85,5.5)
  round 1.5 on Top Overlay: 18(-3.937,-2.54)
  silkscreen extent -5.65,-4.19 5.65,4.19
HDR1X2 [mm] "Connector; Header; 2 Position"
  rect 1.5x1.5 hole 0.9: 1(0,0)
  round 1.5 hole 0.9: 2(2.54,0)
  silkscreen extent -1.27,-1.27 3.81,1.27
HDR1X10 [mm] "Connector; Header; 10 Position"
  rect 1.5x1.5 hole 0.9: 1(0,0)
  round 1.5 hole 0.9: 2(2.54,0) 3(5.08,0) 4(7.62,0) 5(10.16,0) 6(12.7,0) 7(15.24,0) 8(17.78,0) 9(20.32,0) 10(22.86,0)
  silkscreen extent -1.27,-1.27 24.13,1.27
HDR2X2 [mm] "Connector; Header; 2x2 Position"
  rect 1.5x1.5 hole 0.9: 1(0,0)
  round 1.5 hole 0.9: 2(0,2.54) 3(2.54,0) 4(2.54,2.54)
  silkscreen extent -1.27,-1.27 3.81,3.81
HDR2X10 [mm] "Connector; Header; 10x2 Position"
  rect 1.5x1.5 hole 0.9: 1(0,0)
  round 1.5 hole 0.9: 2(0,2.54) 3(2.54,0) 4(2.54,2.54) 5(5.08,0) 6(5.08,2.54) 7(7.62,0) 8(7.62,2.54) 9(10.16,0) 10(10.16,2.54) 11(12.7,0) 12(12.7,2.54) 13(15.24,0) 14(15.24,2.54) 15(17.78,0) 16(17.78,2.54) 17(20.32,0) 18(20.32,2.54) 19(22.86,0) 20(22.86,2.54)
  silkscreen extent -1.27,-1.27 24.13,3.81
HDR2X15 [mm] "Connector; Header; 15x2 Position"
  rect 1.5x1.5 hole 0.9: 1(0,0)
  round 1.5 hole 0.9: 2(0,2.54) 3(2.54,0) 4(2.54,2.54) 5(5.08,0) 6(5.08,2.54) 7(7.62,0) 8(7.62,2.54) 9(10.16,0) 10(10.16,2.54) 11(12.7,0) 12(12.7,2.54) 13(15.24,0) 14(15.24,2.54) 15(17.78,0) 16(17.78,2.54) 17(20.32,0) 18(20.32,2.54) 19(22.86,0) 20(22.86,2.54) 21(25.4,0) 22(25.4,2.54) 23(27.94,0) 24(27.94,2.54) 25(30.48,0) 26(30.48,2.54) 27(33.02,0) 28(33.02,2.54) 29(35.56,0) 30(35.56,2.54)
  silkscreen extent -1.27,-1.27 36.83,3.81
HDR2X16 [mm] "Connector; Header; 16x2 Position"
  rect 1.5x1.5 hole 0.9: 1(0,0)
  round 1.5 hole 0.9: 2(0,2.54) 3(2.54,0) 4(2.54,2.54) 5(5.08,0) 6(5.08,2.54) 7(7.62,0) 8(7.62,2.54) 9(10.16,0) 10(10.16,2.54) 11(12.7,0) 12(12.7,2.54) 13(15.24,0) 14(15.24,2.54) 15(17.78,0) 16(17.78,2.54) 17(20.32,0) 18(20.32,2.54) 19(22.86,0) 20(22.86,2.54) 21(25.4,0) 22(25.4,2.54) 23(27.94,0) 24(27.94,2.54) 25(30.48,0) 26(30.48,2.54) 27(33.02,0) 28(33.02,2.54) 29(35.56,0) 30(35.56,2.54) 31(38.1,0) 32(38.1,2.54)
  silkscreen extent -1.27,-1.27 39.37,3.81
HDR2X20 [mm] "Connector; Header; 20x2 Position"
  rect 1.5x1.5 hole 0.9: 1(0,0)
  round 1.5 hole 0.9: 2(0,2.54) 3(2.54,0) 4(2.54,2.54) 5(5.08,0) 6(5.08,2.54) 7(7.62,0) 8(7.62,2.54) 9(10.16,0) 10(10.16,2.54) 11(12.7,0) 12(12.7,2.54) 13(15.24,0) 14(15.24,2.54) 15(17.78,0) 16(17.78,2.54) 17(20.32,0) 18(20.32,2.54) 19(22.86,0) 20(22.86,2.54) 21(25.4,0) 22(25.4,2.54) 23(27.94,0) 24(27.94,2.54) 25(30.48,0) 26(30.48,2.54) 27(33.02,0) 28(33.02,2.54) 29(35.56,0) 30(35.56,2.54) 31(38.1,0) 32(38.1,2.54) 33(40.64,0) 34(40.64,2.54) 35(43.18,0) 36(43.18,2.54) 37(45.72,0) 38(45.72,2.54) 39(48.26,0) 40(48.26,2.54)
  silkscreen extent -1.27,-1.27 49.53,3.81
"LED 0805" [mm]
  rect 1.1x1.2 smd: 1(-0.98,0) 2(0.98,0)
  silkscreen extent -1.83,-0.97 2.13,0.97
NME1209DC [mm]
  rect 2x2 hole 1: 1(0,0)
  round 2 hole 1: 4(7.62,0) 5(7.62,7.62) 7(2.54,7.62)
  round 1.5 on Top Overlay: 17(-0.254,2.794)
  silkscreen extent -2.16,-1.4 9.78,9.02
NMH1209SC [mm]
  round 2 hole 0.8: 1(0,0) 2(2.54,0) 4(7.62,0) 5(10.16,0) 6(12.7,0)
  round 1.5 on Top Overlay: 15(-0.889,-4.826)
  silkscreen extent -2,-6.16 17.5,1.34
"push button" [mm]
  rect 1.2x2 smd: 1(-1.8,4.5) 1(-1.8,-4.5) 1(1.8,4.5) 1(1.8,-4.5) 2(0,-4.5) NC(0,4.5)
  rect 1x1.42 on Top Overlay: 10(-2.921,2.032)
  round 0 hole 1: NC(-2.875,0) NC(2.875,0)
  silkscreen extent -4.19,-3.3 4.19,3.3
"Reg - SOT223" [mm]
  rect 1.5x0.9 smd: 1(6.604,-2.3) 2(6.604,0) 3(6.604,2.3)
  rect 1.5x3.1 smd: 4(0,0)
  round 1 on Top Overlay: 5(4.572,-2.286)
  silkscreen extent 1.02,-3.3 5.59,3.43
"Reg SOT-89"#1 [mm]
  rect 1.5x0.6 smd: 1(4.25,-1.57) 3(4.25,1.57) 4(4.25,0)
  rect 1.5x1.83 smd: 4(0,0)
  round 1 on Top Overlay: 5(2.413,-1.651)
  silkscreen extent 1.02,-2.41 3.17,2.41
"Reg SOT-89"#2 [mm]
  rect 1.5x0.6 smd: 1(4.25,-1.57) 3(4.25,1.57) 4(4.25,0)
  rect 1.5x1.83 smd: 4(0,0)
  round 1 on Bottom Overlay: 5(2.413,-1.651)
  silkscreen extent 1.02,-2.41 3.18,2.41
"Reg SOT-89 +5"#1 [mm]
  rect 1.5x0.6 smd: 1(4.25,-1.57) 2(4.25,0) 3(4.25,1.57)
  rect 1.5x1.83 smd: 2(0,0)
  round 1 on Top Overlay: 5(2.413,-1.651)
  silkscreen extent 1.02,-2.41 3.17,2.41
"Reg SOT-89 +5"#2 [mm]
  rect 1.5x0.6 smd: 1(4.25,-1.57) 2(4.25,0) 3(4.25,1.57)
  rect 1.5x1.83 smd: 2(0,0)
  round 1 on Bottom Overlay: 5(2.413,-1.651)
  silkscreen extent 1.02,-2.41 3.17,2.41
SOIC14 [mm]
  oval 2.5x0.6 smd: 1(-2.525,3.81) 2(-2.525,2.54) 3(-2.525,1.27) 4(-2.525,0) 5(-2.525,-1.27) 6(-2.525,-2.54) 7(-2.525,-3.81) 8(2.525,-3.81) 9(2.525,-2.54) 10(2.525,-1.27) 11(2.525,0) 12(2.525,1.27) 13(2.525,2.54) 14(2.525,3.81)
  silkscreen extent -2.65,-4.4 0.87,4.78, body extent -2,-4.38 2,4.38, height 1.75
"SOIC16 Narrow width" [mm] "SOIC, 16-Leads, Body 9.90x3.90mm, Pitch 1.27mm, IPC Medium Density"
  rect 1.5x0.6 smd: 1(-2.7,4.445) 2(-2.7,3.175) 3(-2.7,1.905) 4(-2.7,0.635) 5(-2.7,-0.635) 6(-2.7,-1.905) 7(-2.7,-3.175) 8(-2.7,-4.445) 9(2.7,-4.445) 10(2.7,-3.175) 11(2.7,-1.905) 12(2.7,-0.635) 13(2.7,0.635) 14(2.7,1.905) 15(2.7,3.175) 16(2.7,4.445)
  silkscreen extent -2.83,-4.95 1.55,5.42, body extent -1.95,-4.95 1.95,4.95, height 1.75
SOIC16pin [mm] "SOIC, 16-Leads, Body 9.90x3.90mm, Pitch 1.27mm, IPC Medium Density"
  rect 1.5x0.6 smd: 1(-2.7,4.445) 2(-2.7,3.175) 3(-2.7,1.905) 4(-2.7,0.635) 5(-2.7,-0.635) 6(-2.7,-1.905) 7(-2.7,-3.175) 8(-2.7,-4.445) 9(2.7,-4.445) 10(2.7,-3.175) 11(2.7,-1.905) 12(2.7,-0.635) 13(2.7,0.635) 14(2.7,1.905) 15(2.7,3.175) 16(2.7,4.445)
  silkscreen extent -2.83,-4.95 1.55,5.42, body extent -1.95,-4.95 1.95,4.95, height 1.75
"Test Point" [mm]
  round 1.8 hole 1: 1(0,0)
  silkscreen extent -1.42,-1.42 1.42,1.42
TLV5630 [mm]
  rect 2x0.6 smd: 1(0,0)
  oval 2x0.6 smd: 2(0,-1.27) 3(0,-2.54) 4(0,-3.81) 5(0,-5.08) 6(0,-6.35) 7(0,-7.62) 8(0,-8.89) 9(0,-10.16) 10(0,-11.43) 11(9.3,-11.43) 12(9.3,-10.16) 13(9.3,-8.89) 14(9.3,-7.62) 15(9.3,-6.35) 16(9.3,-5.08) 17(9.3,-3.81) 18(9.3,-2.54) 19(9.3,-1.27) 20(9.3,0)
  silkscreen extent 1.84,-12.06 7.46,0.64
"Zener DZ2J047" [mm]
  rect 1x0.6 smd: 1(-1.27,0) 2(1.27,0)
  silkscreen extent -0.76,-0.76 0.89,0.76

## Part data
1: library part AD8056
3.3k R1 R2 R3 R4 R5 R6 R7 R8 R9 R10 R11 R12 R13 R14 R15 R16 R17 R18 R19 R20 R21 R22 R23 R24 R25 R26 R27 R28 R29 R30 R31 R32 R33 R34 R35 R36 R37 R38 R39 R40 R41 R42 R43 R44 R45 R46 R47 R49 R50 R51 Rc Rx1 Rx2 Rx3 Rx4 Rx5 Rx6: "Resistor", Published=8-Jun-2000, Publisher="Altium Limited"
  3.3k R1 R3 R5 R6 R7 R8 R36 R37 R38 R39 R40 R41 R42 R43 R44 R45 R46 R47 R49 R50 R51 Rc Rx1 Rx2 Rx3 Rx4 Rx5 Rx6: Revision="July-2002: Re-released for DXP Platform."
  R2 R4 R9 R10 R11 R12 R13 R14 R15 R16 R17 R18 R19 R20 R21 R22 R23 R24 R25 R26 R27 R28 R29 R30 R31 R32 R33 R34 R35: LatestRevisionDate=17-Jul-2002, LatestRevisionNote="Re-released for DXP Platform.", PackageReference=AXIAL-0.3
C1 C2 C3 C8 C10 C11 C12 C15 C18 C20 C21 C23 C25 C77: library part "Cap Pol1", "Polarized Capacitor (Radial)", LatestRevisionDate=17-Jul-2002, LatestRevisionNote="Re-released for DXP Platform.", PackageReference=RB7.6-15, Published=8-Jun-2000, Publisher="Altium Limited"
C4 C9 C13 C19 C22 C24 C26 C27 C28 C29 C30 C33 C34 C35 C36 C37 C38 C39 C40 C41 C42 C43 C44 C45 C46 C47 C48 C49 C50 C51 C52 C53 C54 C55 C56 C57 C58 C59 C60 C61 C63 C64 C67 C68 C69 C71 C72 C73 C74 C75 C76 Cc Cd Cd2 Cd4 Cd5: "Capacitor", LatestRevisionDate=17-Jul-2002, LatestRevisionNote="Re-released for DXP Platform.", PackageReference=RAD-0.3, Published=8-Jun-2000, Publisher="Altium Limited"
D1 D2 D3 D4 D5 D6 D7 D8 D9 D10 D11 D12 D13: library part "D Zener", "Zener Diode", LatestRevisionDate=17-Jul-2002, LatestRevisionNote="Re-released for DXP Platform.", PackageReference=DIODE-0.7, Published=8-Jun-2000, Publisher="Altium Limited"
"Digital ISO1": library part "Digital Isolator 2/1", "SI8631BC-B-IS1"
LED1 LED2 LED3: library part LED3, "Typical BLUE SiC LED", PackageDocument=16-Apr-2002, DatasheetDocument=16-Apr-2002, LatestRevisionDate=17-Dec-2003, LatestRevisionNote="PCB Footprint replaced.", PackageReference=3.5X2.8X1.9, Published=8-Jun-2000, Publisher="Altium Limited"
NME1: library part NME----DC
NMH1: library part NMH----SC_1
NMH2: library part NMH----SC
OPT3: library part "digital isolator 16 pin"
opto1 opto2 opto3 opto4 opto5: library part Component_1
P1: "Header, 15-Pin, Dual row", LatestRevisionDate=17-Jul-2002, LatestRevisionNote="Re-released for DXP Platform.", Publisher="Altium Limited"
P2: "Header, 16-Pin, Dual row", LatestRevisionDate=17-Jul-2002, LatestRevisionNote="Re-released for DXP Platform.", Publisher="Altium Limited"
P3: library part "Header 20X2", "Header, 20-Pin, Dual row", LatestRevisionDate=17-Jul-2002, LatestRevisionNote="Re-released for DXP Platform.", Publisher="Altium Limited"
P4: "Header, 2-Pin, Dual row", LatestRevisionDate=17-Jul-2002, LatestRevisionNote="Re-released for DXP Platform.", Publisher="Altium Limited"
P5: library part "Header 10", "Header, 10-Pin", LatestRevisionDate=17-Jul-2002, LatestRevisionNote="Re-released for DXP Platform.", Publisher="Altium Limited"
P6: library part "Header 10X2", "Header, 10-Pin, Dual row", LatestRevisionDate=17-Jul-2002, LatestRevisionNote="Re-released for DXP Platform.", Publisher="Altium Limited"
P7: library part "Header 2", "Header, 2-Pin", LatestRevisionDate=17-Jul-2002, LatestRevisionNote="Re-released for DXP Platform.", Publisher="Altium Limited"
SW1: library part SW-PB, "Switch", Published=24-Mar-1999, Publisher="Altium Limited", Revision="July-2002: Re-released for DXP Platform."
U1 U4: library part L78L05ABZ, "Positive Voltage Regulator", ComponentLink1Description="Manufacturer Link", ComponentLink1URL=http://www.st.com/, DatasheetVersion=Feb-1999, LatestRevisionDate=17-Jul-2002, LatestRevisionNote="Re-released for DXP Platform.", PackageDescription="TO, Flat Index; 3 In-Line, Axial Leads; Body Dia. 4.8mm; Leads 0.51 x 0.51 mm (max)", PackageReference=TO92, Published=24-Aug-2001, Publisher="Altium Limited"
U3 U6: library part µA79M05CKTPR, "Negative-Voltage Regulator", Code_JEDEC=TO-252, ComponentLink1Description="Manufacturer Link", ComponentLink1URL=http://www.ti.com/, ComponentLink2Description=Datasheet, ComponentLink2URL=http://www-s.ti.com/sc/ds/ua79m05.pdf, DatasheetVersion=Apr-2000, Note="Pin 2 is electrically connected to pin4, and not drawn.", PackageDescription="PowerFLEX (D-PAK/TO-252-AA); 3 Leads (1 Cropped); Body 9.7 (inc. leads) x 6.2 mm (LxW max)", PackageReference=KTP02, PackageVersion=Jan-2001, Published=15-Apr-2002, Publisher="Altium Limited"
U7 U8: library part µA7805CKTER, "Positive-Voltage Regulator", Code_JEDEC=MO-169, ComponentLink1Description="Manufacturer Link", ComponentLink1URL=http://www.ti.com/, ComponentLink2Description=Datasheet, ComponentLink2URL=http://www-s.ti.com/sc/ds/ua7805.pdf, DatasheetVersion=Jul-1999, Note="Pin 2 is electrically connected to TAB/Pin4.", PackageDescription="PowerFLEX; 3 Leads; Body 10.7 (inc. leads) x 9.5 mm (LxW max)", PackageReference=KTE03, PackageVersion=Jan-2001, Published=15-Apr-2002, Publisher="Altium Limited"
U9 U11 U13: library part TS27L4AMD, "Very Low-Power CMOS Quad Operational Amplifier", Code_IPC=SOIC127P600-14, ComponentLink1Description="Manufacturer Link", ComponentLink1URL=http://www.st.com/, ComponentLink2Description=Datasheet, ComponentLink2URL=http://www.st.com/stonline/products/literature/ds/2305/ts27l4.pdf, DatasheetVersion=Nov-1998, LatestRevisionDate=13-Apr-2006, LatestRevisionNote="IPC-7351 Footprint Added.", PackageDescription="14-Pin Small Outline Integrated Circuit 1.27 mm Pitch", PackageReference=SO14, PackageVersion=Sep-1998, Published=24-Aug-2001, Publisher="Altium Limited"
U10 U12 U14: library part TL074J, "Low-Noise JFET-Input Operational Amplifier", ComponentLink1Description="Manufacturer Link", ComponentLink1URL=http://www.ti.com/, ComponentLink2Description=Datasheet, ComponentLink2URL=http://www-s.ti.com/sc/ds/tl074.pdf, DatasheetVersion=Aug-1996, LatestRevisionDate=04-Mar-2005, LatestRevisionNote="Stylized 3D Model Added.", PackageDescription="DIP; 14 Leads; Row Spacing 7.62 mm; Pitch 2.54 mm", PackageReference=J014, PackageVersion=Jun-1999, Published=16-Jan-2001, Publisher="Altium Limited"

## Via types
v1: diameter 50, hole 28, Top Layer to Bottom Layer, 80 vias

## Nets (pads, with @x,y where several pads share a name; then routed paths per layer and width w, separated by ;. In a path a pad name is that pad's centre, name@x,y a point inside that pad or via, vN(x,y) a via of type N, cw(c..) or ccw(c..) an arc to the next point about the centre after c; other vN are vias at no path point)
1.65_REF: C57.2 C63.1 C64.1 R31.1 R35.1 TP24.1 | length 606.1
  Bottom Layer w30: R31.1@535,-2363.4 626.4,-2363.4 C57.2@630,-2367 792,-2367 820,-2395 C63.1@862,-2395 969,-2395 C64.1@973,-2391 R35.1@973,-2324.6 ; R35.1@948.4,-2300 R35.1@973,-2324.6 ; TP24.1@1018,-2342 990.4,-2342 R35.1@973,-2324.6
1.65_REFOPAMP: R2.1 R4.2 U14.12 | length 499.8
  MIddle Layer 2 w40: v1(720,-2573.6) 720,-2495 748.57,-2466.43 U14.12@748.57,-2182
  Bottom Layer w40: R2.1@628.4,-2585 708.6,-2585 R4.2@712.6,-2581 v1(720,-2573.6)
12V_P: C2.1 C15.1 C24.2 NME1.4 NMH1.1 NMH2.1 P1.11 P1.12 | length 2624.9
  Top Layer w40: C2.1@57,-4529 57,-4310 NMH1.1@58,-4309 ; NME1.4@767,-4229 875,-4121 875,-3900 747,-3772 C15.1@747,-3630 747,-3513 NMH2.1@706,-3472 706,-3392 844,-3254 931,-3254 P1.12@1046,-3139
  MIddle Layer 2 w40: NMH2.1@706,-3472 NMH2.1@713,-3472 ; P1.12@1046,-3139 P1.11@1046,-3039
  Bottom Layer w40: NMH1.1@58,-4309 112,-4363 633,-4363 NME1.4@767,-4229 ; NME1.4@767,-4237 784,-4220 C24.2@784,-4130
-12: C20.2 NMH2.4 P1.23 P1.24 U6.4 | length 1390.6
  Bottom Layer w40: NMH2.4@406,-3472 406,-3460 463.37,-3402.63 565.37,-3402.63 663,-3305 663,-3245 616.53,-3198.53 505.53,-3198.53 P1.24@446,-3139 P1.23@446,-3039 446,-3007 527,-2926 603,-2926 759,-2770 U6.4@759,-2744 U6.4@591.68,-2744
A_out: ATESTIN.1 DAC1.12 R49.1 | length 847
  Top Layer w20: v1(1743,-4365) 1740,-4362 1757,-4362 1775.13,-4343.87 DAC1.12@1775.13,-4241.86 1775.13,-4122.27 R49.1@1784,-4113.4
  Signal Layer 1 w20: ATESTIN.1@1305,-4056 1443,-4194 1522,-4194 1693,-4365 v1(1743,-4365)
DSP_3V3: "Digital ISO1.1" C21.1 C22.2 C27.1 C29.1 DAC1.20 OPT3.1 P7.2 R1.2 R3.2 R5.1 R45.1 TP10.1 U7.3 | length 4796.5
  Top Layer w30: R3.2@1240.55,-4234.45 1296.11,-4290 1334,-4290 1375.13,-4248.87 DAC1.20@1375.13,-4241.86 ; 2223.3,-3176 2276,-3176 v1(2315,-3215) ; OPT3.1@2224.3,-3632 2272,-3632 v1(2336,-3696) ; R45.1@2379.4,-2879 2455,-2879 2509,-2825 2509,-2769 TP10.1@2416,-2676
  Top Layer w40: U7.3@852.45,-4356 1051.45,-4555 1122,-4555 ; C22.2@1209,-4773 1227.63,-4754.37 C21.1@1227.63,-4660 1227.63,-4595.63 1187,-4555 1122,-4555 ; R3.2@1240.55,-4234.45 1240,-4235 R1.2@1240,-4406.6 1161.4,-4406.6 ; P7.2@1556,-3790 1540,-3806 1401,-3806 1161.4,-4045.6 1161.4,-4406.6 ; 1122,-4555 1122,-4446 1161.4,-4406.6
  MIddle Layer 2 w30: P7.2@1556,-3790 1621,-3725 2307,-3725 v1(2336,-3696)
  Bottom Layer w30: v1(2315,-3215) 2353,-3215 2379,-3241 ; v1(2336,-3696) 2335,-3695 2379,-3651 2379,-3241 ; R5.1@2523,-2584.4 2431.4,-2676 TP10.1@2416,-2676 2379,-2713 2379,-3241
DSP_5V: 1.8 3.3k.2 C25.1 C26.2 C33.2 C46.2 C56.2 C76.2 C77.1 Cd4.1 Cd5.1 DAC1.11 P1.29 P1.30 P2.1 P2.2 R37.1 Rx1.2 Rx3.2 Rx5.2 TP11.1 U8.3 U9.4 U11.4 U13.4 | length 12031.2
  Top Layer w30: U8.3@1109,-3593.45 1208.45,-3593.45 C26.2@1228,-3613 ; DAC1.11@1825.13,-4241.86 1923.09,-4241.86 C77.1@1925.9,-4239.05 ; C56.2@2083,-2570 2086,-2567 U13.4@2086,-2376.41 ; U11.4@2085,-1496.41 2085,-1817 v1(2091,-1823) ; C46.2@2107,-1836 2107,-1840 C46.2@2111,-1840 ; 1.8@2225.28,-3840 Cd4.1@2320,-3840 ; Cd4.1@2345,-3865 Cd5.1@2345,-3961 2345,-4022.53 3.3k.2@2444.07,-4121.6
  MIddle Layer 2 w30: v1(1227,-3599) 1262,-3599 ; P2.2@1552,-978 P2.1@1552,-878
  Signal Layer 1 w30: P1.29@146,-3039 P1.30@146,-3139 146,-3269 240,-3363 736,-3363 972,-3599 v1(1227,-3599) 1442.11,-3599 1604.11,-3761 2321,-3761 ; v1(1387,-4797.4) 1378.32,-4788.72 1378.32,-4540.68 1436,-4483 1548.71,-4483 1549.71,-4484 1708,-4484 1817,-4375 1817,-4322 1899,-4240 v1(1927,-4240) 1927,-4195 1975,-4147 2203,-4147 2344,-4006 v1(2344,-3838) 2344,-3784 2321,-3761 ; P2.2@1552,-978 1552,-1060 1558,-1066 1603,-1066 1688,-1151 1688,-1679 1785,-1776 2044,-1776 v1(2091,-1823) 2091,-1958 ; v1(1807,-2436) 1910,-2436 2043,-2569 v1(2080,-2569) ; v1(2416,-2485) 2408,-2477 2408,-2493 2287,-2614 ; TP11.1@2888,-1851 2775,-1964 2510,-1964 2432,-2042 v1(2295,-2042) 2295,-2011 2242,-1958 2091,-1958 ; v1(2080,-2569) 2137,-2626 2275,-2626 2287,-2614 ; v1(2080,-2569) 2222,-2569 2322,-2469 2322,-2210 2091,-1979 2091,-1958 ; 2287,-2614 2287,-2664 2186,-2765 2186,-3626 2321,-3761
  Bottom Layer w30: P2.1@1552,-878 1560,-886 2274,-886 2347,-813 U9.4@2347,-580 C33.2@2347,-475
DSPGND: 1.4 "Digital ISO1.2" "Digital ISO1.8" C21.2 C22.1 C23.2 C25.2 C26.1 C27.2 C29.2 C33.1 C34.1 C35.1 C36.1 C37.1 C46.1 C56.1 C67.2 C68.2 C69.2 C71.2 C72.2 C73.2 C74.2 C75.2 C76.1 C77.2 Cc.2 Cd2.2 Cd4.2 Cd5.2 D1.1 D2.1 D3.1 D4.1 D6.1 D8.1 D10.1 D11.1 D13.1 DAC1.1 DAC1.10 DAC1.18 LED1.2 LED2.2 LED3.2 NME1.7 OPT3.8 opto1.5 opto2.5 opto3.5 opto4.5 opto5.5 P2.3 P2.4 P2.13 P2.14 P3.19 P3.20 P3.39 P3.40 P6.1 P6.3 P6.5 P6.7 P6.9 P6.11 P6.13 P6.15 P6.17 P6.18 P6.19 P6.20 R11.1 R12.1 R15.1 R16.1 R47.1 R51.1 Rx2.1 Rx4.1 Rx6.1 SW1.2 TP12.1 U7.2 U7.4 U8.2 U8.4 U9.11 U11.3 U11.5 U11.10 U11.11 U11.12 U13.11 U13.12 | length 27650.7
  Top Layer w20: D11.1@2434,-1406 2434,-1405.47 2670.53,-1405.47 2701,-1375 2719,-1375 P6.11@2739,-1355
  Top Layer w30: SW1.2@445.17,-2447.81 1013.81,-2447.81 1118,-2552 1479.96,-2552 opto4.5@1563.54,-2468.43 ; v1(1540,-4421) 1578,-4459 1604.71,-4459 1660.71,-4515 1870.59,-4515 ; opto5.5@1666.43,-189.46 1829.54,-189.46 1968,-51 C37.1@2061,-51 ; DAC1.10@1825.13,-4608 1825.13,-4560.46 1870.59,-4515 ; 2004,-4533 2003.46,-4533.54 1889.12,-4533.54 1870.59,-4515 ; U11.3@2035,-1496.41 U11.12@2035,-1297.59 U11.11@2085,-1297.59 U11.10@2135,-1297.59 U11.5@2135,-1496.41 2135,-1751 C46.1@2203.5,-1819.5 ; 2060,-2177.59 U13.11@2086,-2177.59 2086,-2107 2231,-1962 2346,-1962 ; D1.1@2140,-724 2201,-724 2260,-783 C35.1@2345,-783 2431.4,-783 R12.1@2447,-767.4 2552.4,-767.4 2639,-854 P6.20@2639,-955 ; 2217.5,-1833.5 2346,-1962 ; 2223.3,-3126 2371,-3126 v1(2458,-3213) 2389,-3282 OPT3.8@2224.3,-3282 ; 2223.3,-2826 2254.3,-2795 v1(2449,-2795) ; U9.11@2347,-280.79 2303,-236.79 2303,-94 2341,-56 2540,-56 C36.1@2561,-77 2596,-42 2713.4,-42 R15.1@2749,-77.6 2871.6,-77.6 2901,-107 D3.1@2901,-275 2901,-582 D2.1@2904,-585 ; Cd5.2@2425,-3961 Cd4.2@2425,-3846 ; Rx6.1@2463.07,-2135.4 2490.6,-2135.4 2538,-2088 2538,-1962 ; P3.40@2637,-2205 P3.39@2737,-2205 2869,-2205 ; P6.1@2739,-1855 2632,-1962 2538,-1962 ; P6.7@2739,-1555 2805,-1621 D8.1@2842,-1621 ; P6.11@2739,-1355 2741,-1353 D10.1@2836,-1353 ; P6.13@2739,-1255 2782,-1298 D6.1@2831,-1298 ; LED2.2@2914,-2631.42 2842,-2559.42 2842,-2412 ; LED1.2@2915.4,-2401.42 2852.58,-2401.42 2842,-2412 ; 2346,-1962 D13.1@2422,-1962 2538,-1962 ; 2842,-2412 2842,-2232 2869,-2205 ; 2869,-2205 2889.58,-2184.42 LED3.2@2910.4,-2184.42 2889.82,-2205 2869,-2205
  Top Layer w40: U8.4@849,-3684 U8.2@1109,-3684 1219,-3684 C26.1@1228,-3693 ; v1(861,-4726) 861,-4698 U7.4@943,-4616 ; U7.2@943,-4356 943,-4336 880.55,-4273.55 830.45,-4273.55 781,-4323 781,-4428 943,-4590 U7.4@943,-4616 ; C22.1@1129,-4773 1115.43,-4759.43 C21.2@1115.43,-4660 1071.43,-4616 U7.4@943,-4616 ; v1(1292,-4555) 1345,-4608 DAC1.1@1375.13,-4608 ; DAC1.18@1475.13,-4241.86 1475.13,-4356.13 v1(1540,-4421) ; v1(1760,-3933) 1776.6,-3916.4 R47.1@1891,-3916.4 ; v1(1930,-2599) 2008,-2677 2116,-2677 2168,-2625 2168,-2575 C56.1@2163,-2570 2223,-2570 2323,-2470 2323,-2333 2291,-2301 ; C73.2@2001,-4592 C73.2@2001,-4570.52 ; C75.2@2003,-4359 2003,-4314 2038.1,-4278.9 C77.2@2038.1,-4239.05 ; C73.2@2004,-4592 C71.2@2004,-4703 2021,-4703 2198,-4526 2346,-4526 2445,-4427 R51.1@2445,-4363.4 ; C73.2@2004,-4570.52 2004,-4533 C75.2@2004,-4360 ; 1.4@2010.72,-3990 2142,-3990 2189,-4037 Cd2.2@2189,-4088 ; 2060,-2177.59 2060,-2229 2114,-2283 2273,-2283 2291,-2301 ; C46.1@2187,-1836 2215,-1836 2217.5,-1833.5 ; Rx2.1@2414,-2258.6 2335.4,-2258.6 2293,-2301 2291,-2301 ; Cd4.2@2429,-3850 v1(2502,-3850)
  MIddle layer1 w18: P2.14@952,-978 P2.13@952,-878 ; P2.3@1452,-878 P2.4@1452,-978 1452,-1347.89 ; opto4.5@1563.54,-2468.43 1452,-2356.89 1452,-1852.39 ; opto3.5@1563.54,-1963.93 1452,-1852.39 ; opto2.5@1563.54,-1459.43 1452,-1347.89 ; 1452,-1852.39 1452,-1347.89
  MIddle layer1 w30: opto1.5@1178.43,-192.46 1178.43,-236.43 1232,-290 1625,-290 1666.43,-248.57 opto5.5@1666.43,-189.46 2255.68,-189.46 U9.11@2347,-280.79 2477.21,-411 2727,-411 2739,-423 P6.19@2739,-955 ; opto4.5@1563.54,-2468.43 1648.43,-2468.43 1664,-2484 1664,-2611 1731,-2678 1888,-2678 1930,-2636 v1(1930,-2599) ; v1(2449,-2795) v1@2459,-2795 ; v1@2457,-3214 v1(2458,-3213) ; P6.18@2639,-1055 P6.20@2639,-955 P6.19@2739,-955 ; P3.19@2737,-3205 2757,-3205 2829,-3133 2829,-2297 P3.39@2737,-2205 2737,-2090 TP12.1@2707,-2060 2707,-1887 P6.1@2739,-1855 P6.3@2739,-1755 P6.5@2739,-1655 P6.7@2739,-1555 P6.9@2739,-1455 P6.11@2739,-1355 P6.13@2739,-1255 P6.15@2739,-1155 P6.17@2739,-1055 P6.19@2739,-955
  MIddle layer1 w40: P2.13@952,-878 952,-859 1036,-775 1398,-775 1452,-829 P2.3@1452,-878 ; NME1.7@1067,-4029 1067,-4034 1240,-4207
  MIddle Layer 2 w30: v1(2458,-3213) 2629,-3213 P3.20@2637,-3205
  MIddle Layer 2 w40: v1(861,-4726) 1034,-4553 1290,-4553 v1(1292,-4555) 1292,-4531 1386,-4437 1524,-4437 v1(1540,-4421) ; NME1.7@1067,-4029 1224,-3872 v1(1224,-3705)
  Signal Layer 1 w30: v1(1760,-3933) 2116,-3933 2191,-4008 v1(2191,-4086)
  Bottom Layer w18: 2301.6,-798.4 2301.6,-603.23 2297.1,-598.73 2297.1,-559.9 2293.54,-556.33 2293.54,-440.54 2340.07,-394 C33.1@2346,-394
  Bottom Layer w20: R11.1@2245,-798.4 2301.6,-798.4
  Bottom Layer w30: C23.2@922,-3973 1003,-3973 NME1.7@1067,-4037 ; C68.2@1753,-3829 1760,-3836 v1(1760,-3933) ; v1(2026,-4237) 2036,-4227 C67.2@2158,-4227 ; C34.1@2150,-801 2242.4,-801 R11.1@2245,-798.4 ; C72.2@2160,-4457 2160,-4229 C67.2@2158,-4227 ; v1(2191,-4086) 2191,-4127 2158,-4160 C67.2@2158,-4227 ; D4.1@2251,-393 2345,-393 C33.1@2346,-394 2346,-281.79 U9.11@2347,-280.79 ; v1(2449,-2795) 2449,-3191.6 2448.43,-3192.25 v1(2458,-3213) ; P3.20@2637,-3205 P3.19@2737,-3205
  Bottom Layer w40: v1(861,-4726) 861,-4707 1151,-4417 1151,-4113 NME1.7@1067,-4029 ; C25.2@1224,-3726 v1(1224,-3705) ; v1(2191,-4086) 2191,-4040 2338,-3893 2366.78,-3893 2399,-3860.78 2399,-3832 2442.61,-3788.39 ; 2457,-3781 C27.2@2457,-3397 2457,-3214 v1(2458,-3213)